# Altium PCB SoM-STM32F4.PcbDoc (part 1 of 2)
Units mm, origin at the board's own origin, x right, y up, seen from the top; angles counter-clockwise.
Board outline 45 x 60 mm, 8 copper layers (Top, GND1, Signal 1, Power, GND3, Signal 2, GND4, Bottom), stack 1.6 mm thick; 102 components, 130 nets, 627 pads, 262 vias.
Unrouted connection lines stored in the file: 167.
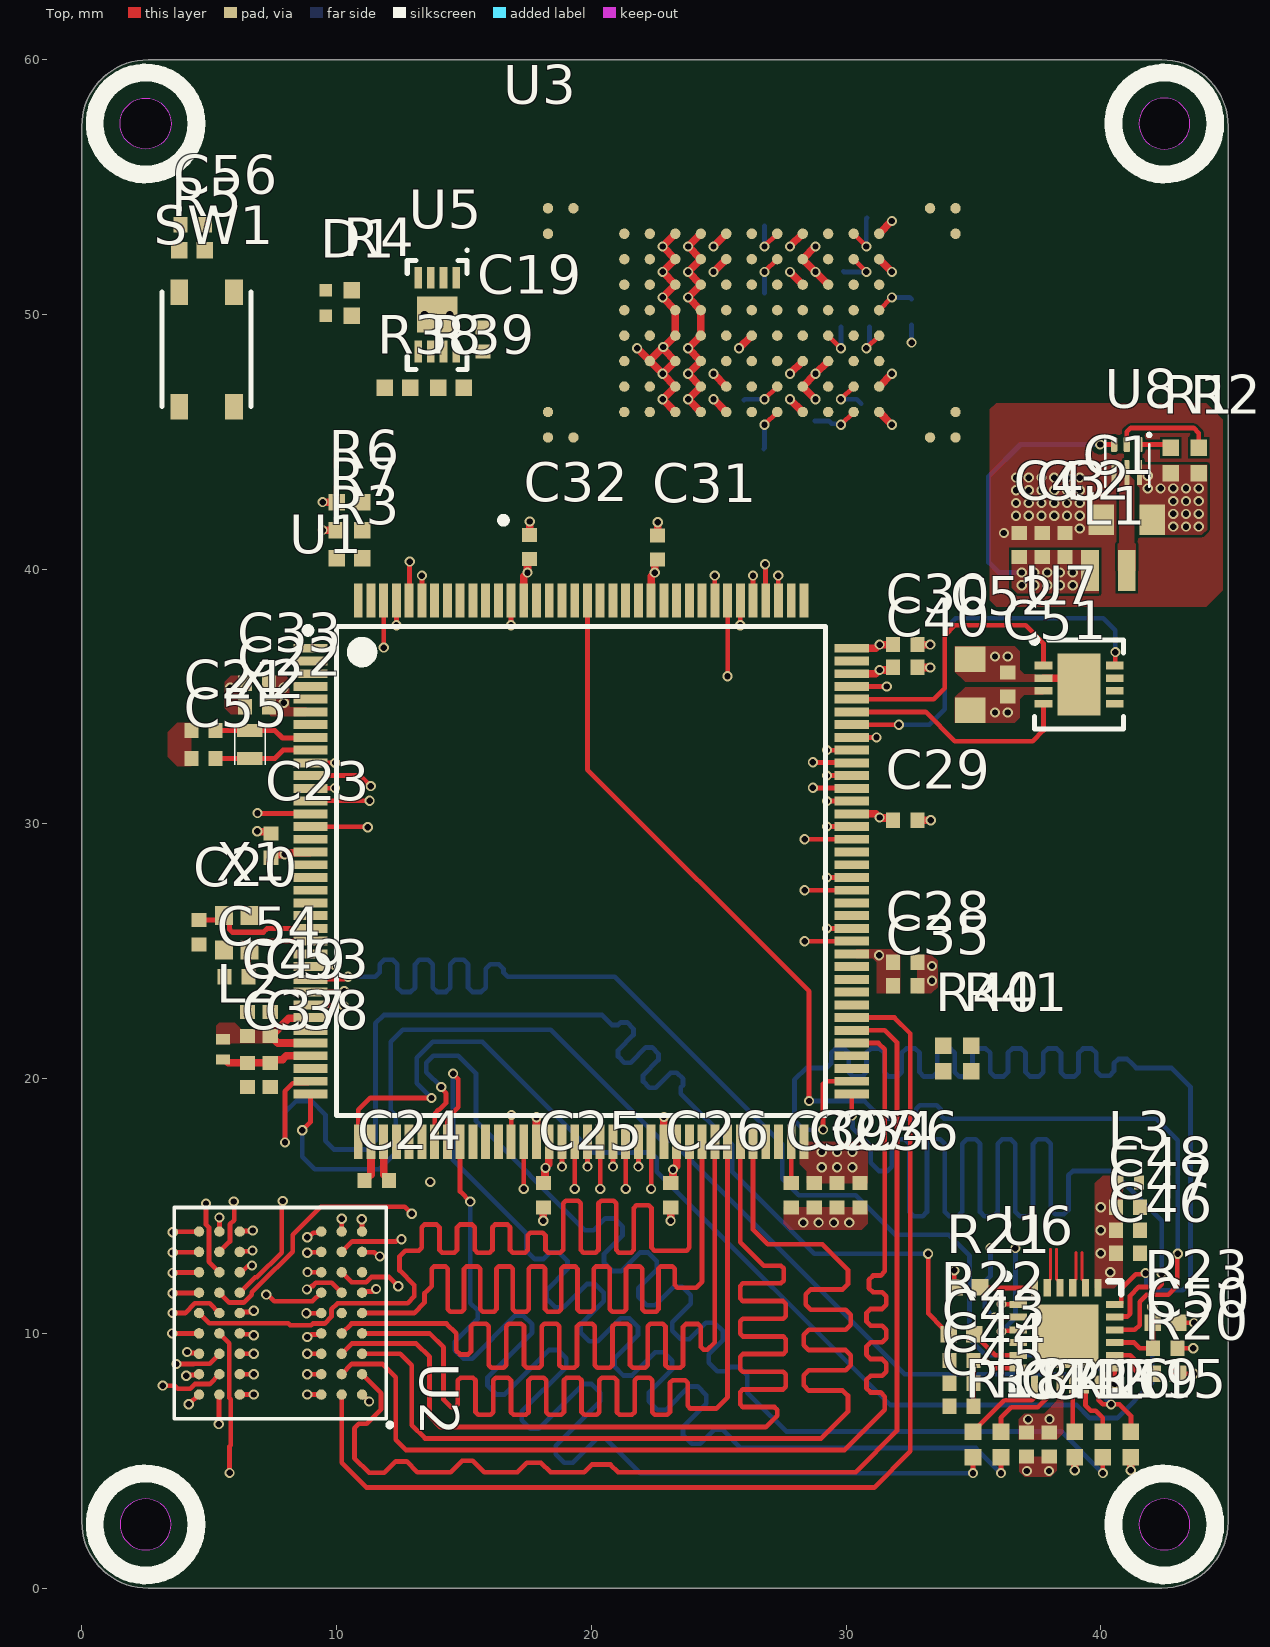
[diagram p0: Top view]
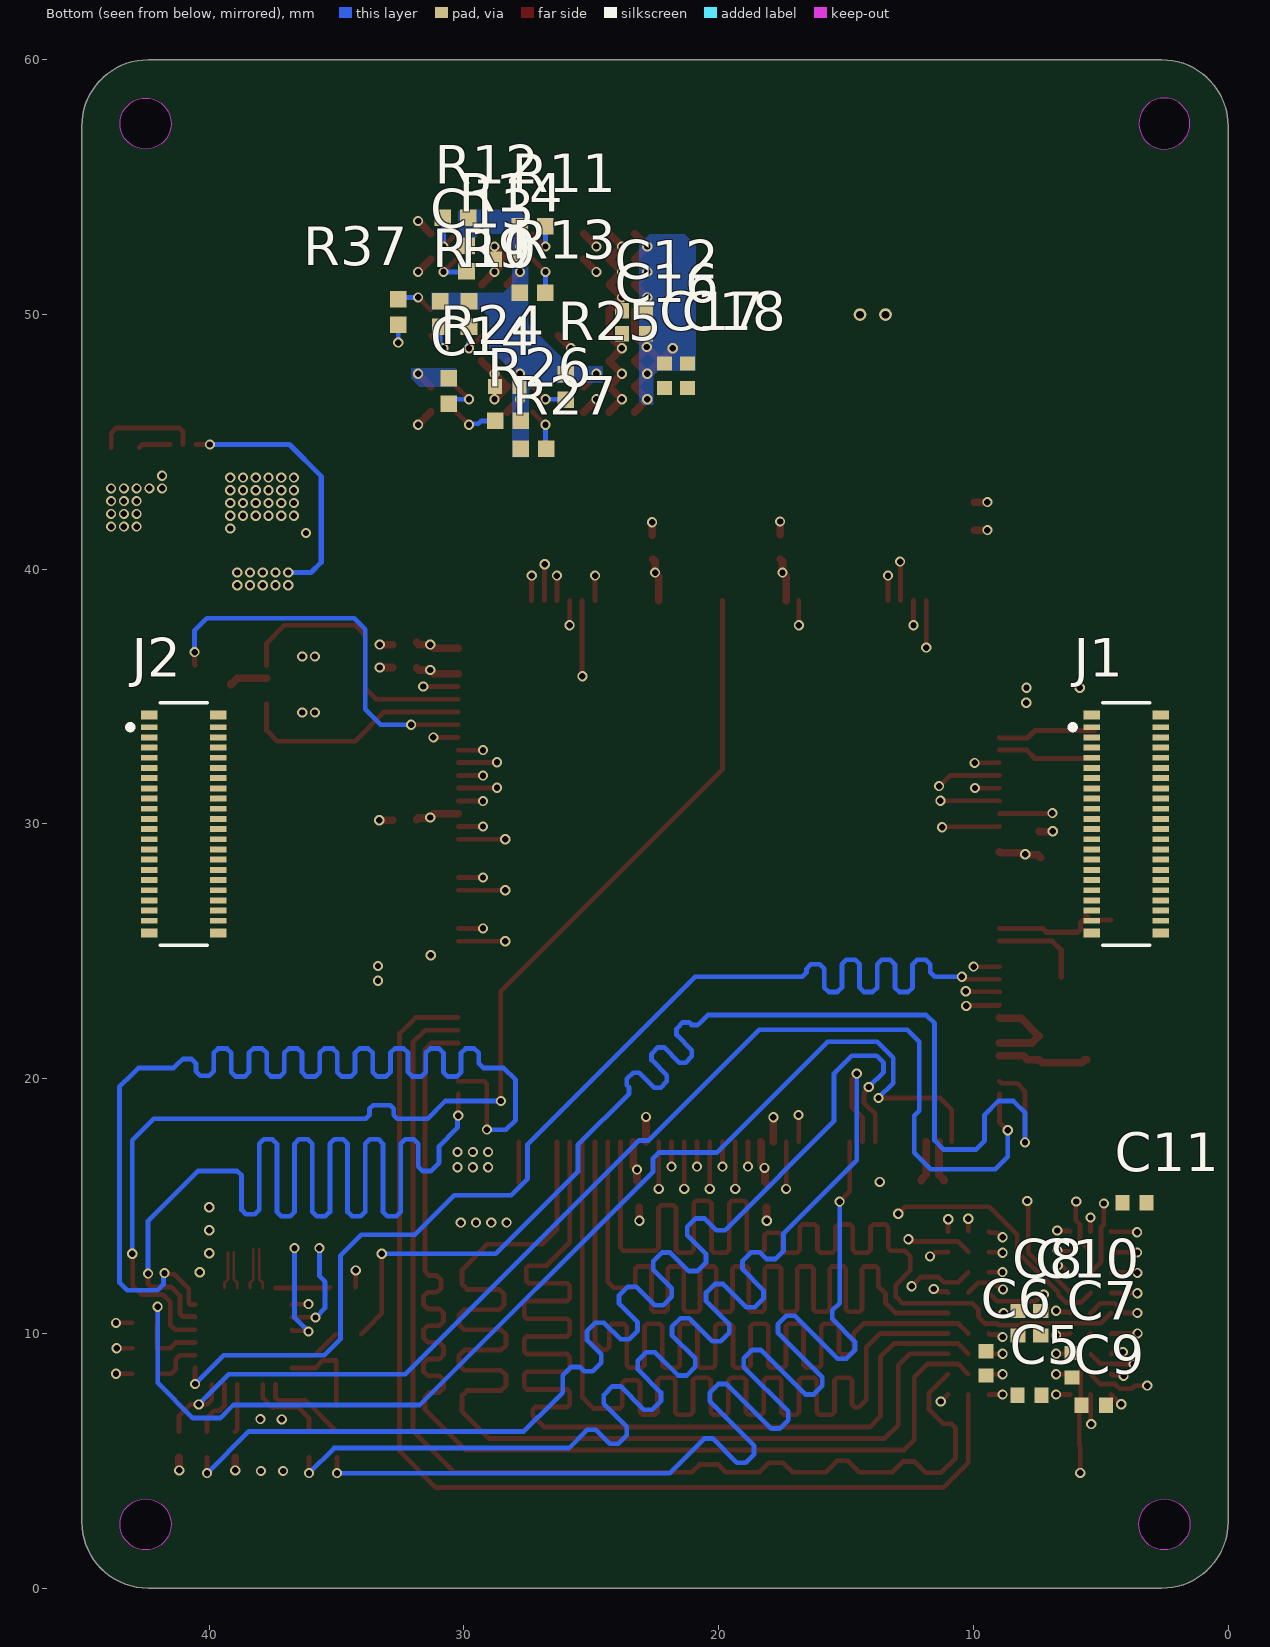
[diagram p1: Bottom view, seen from below]
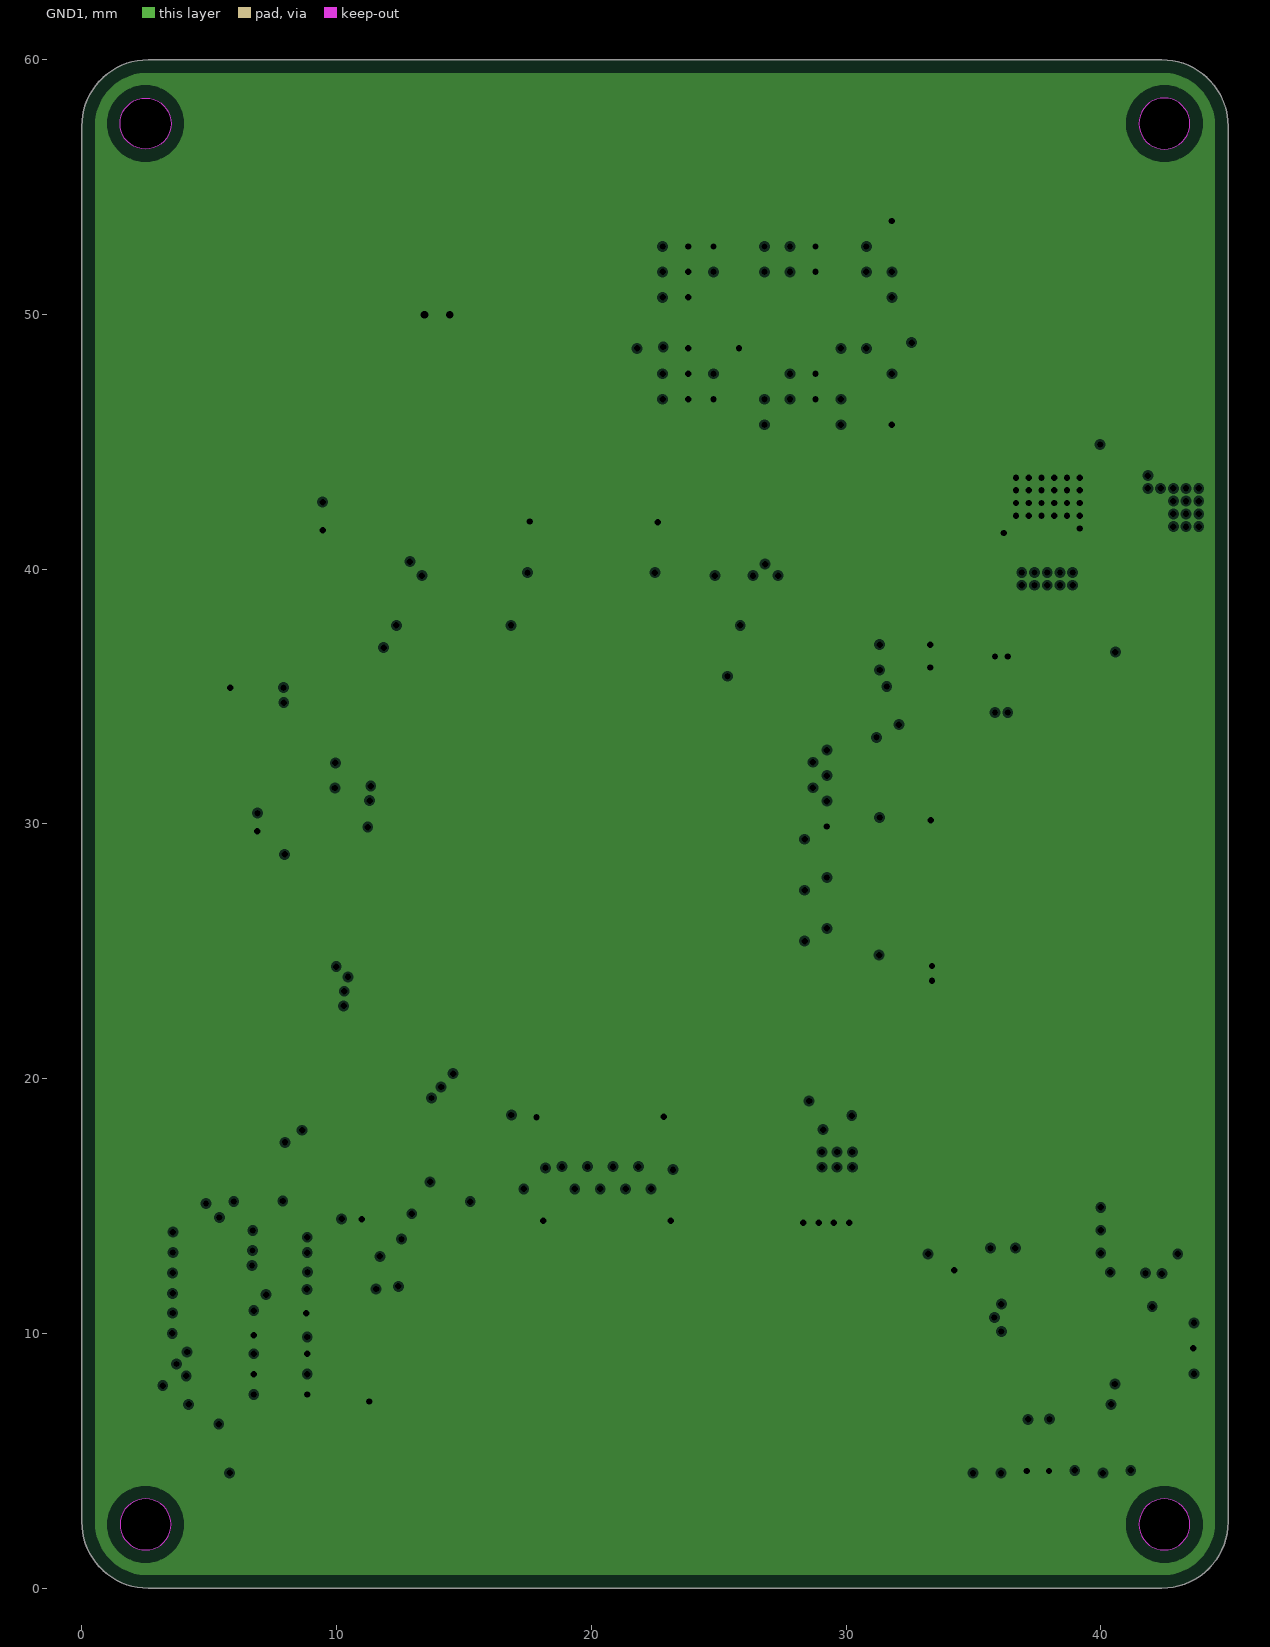
[diagram p2: GND1, clearances drawn from the general rule]
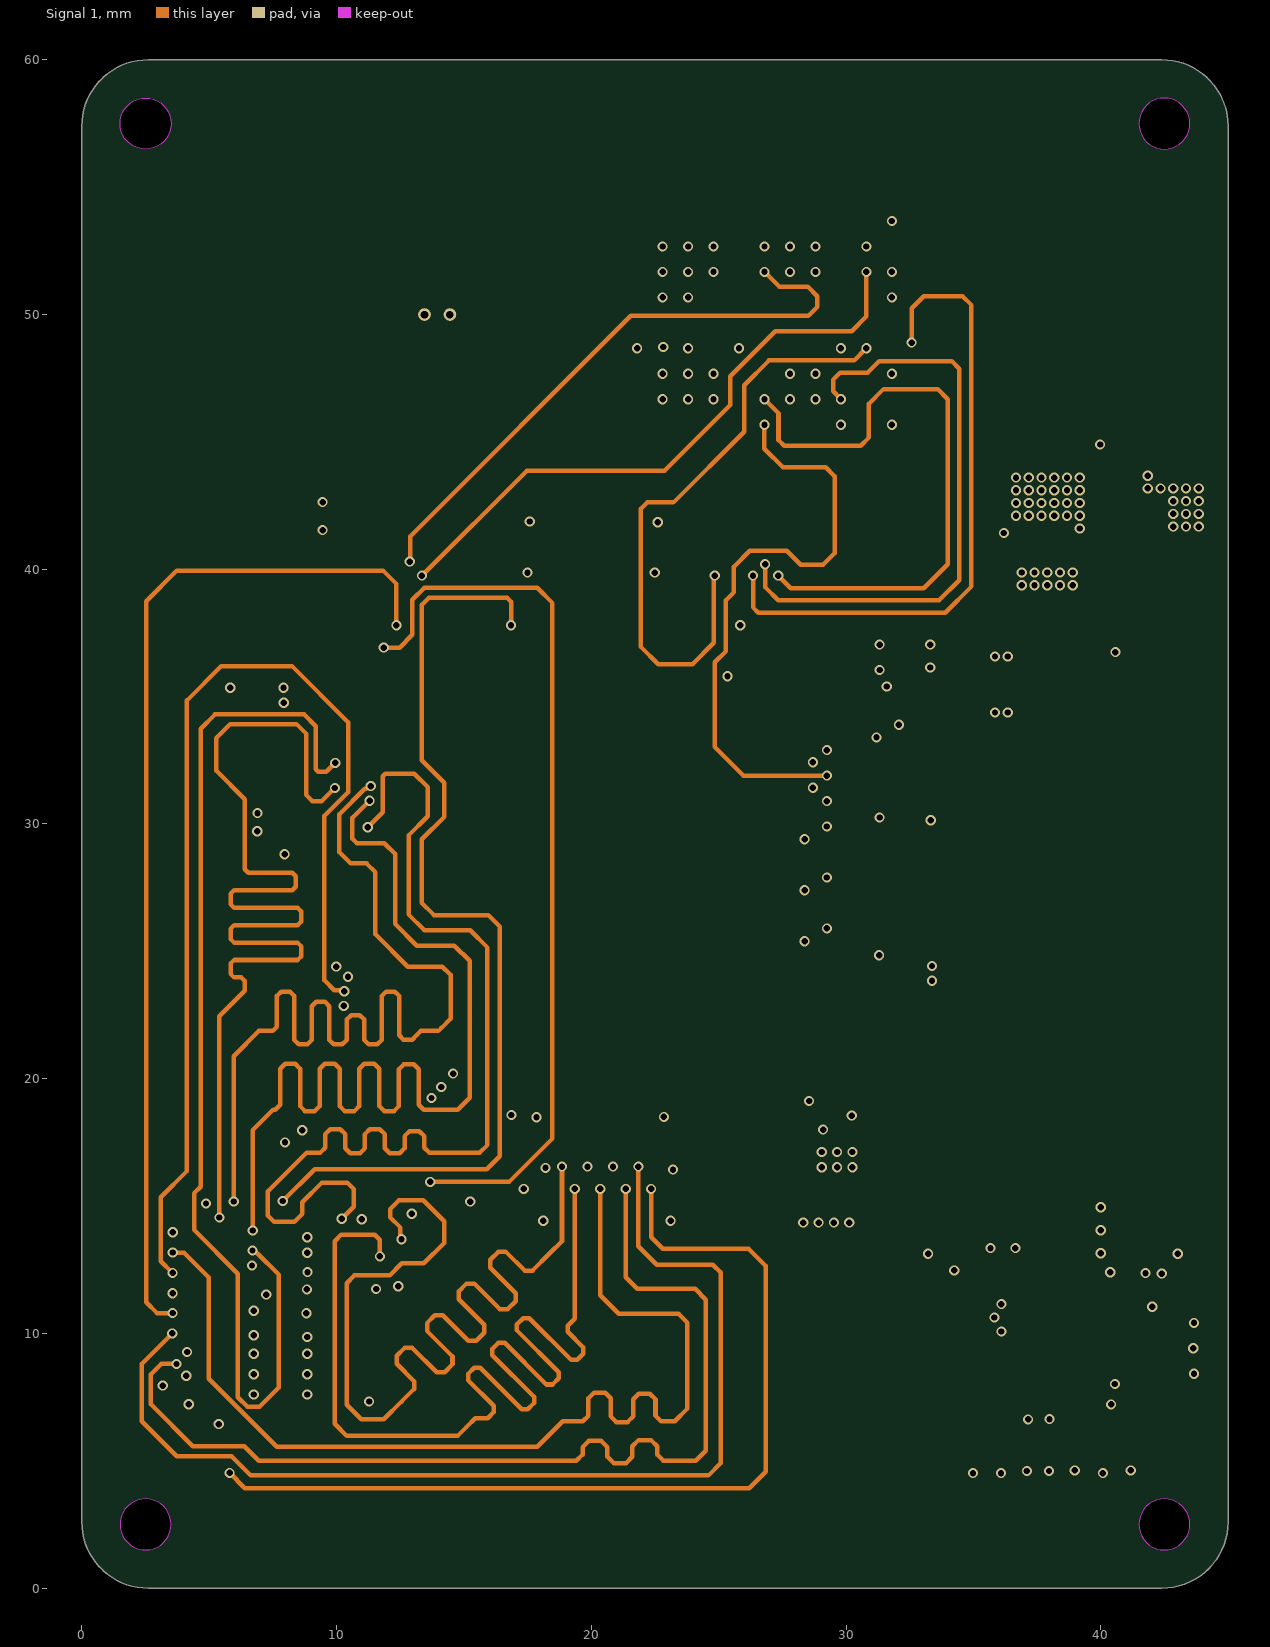
[diagram p3: Signal 1]
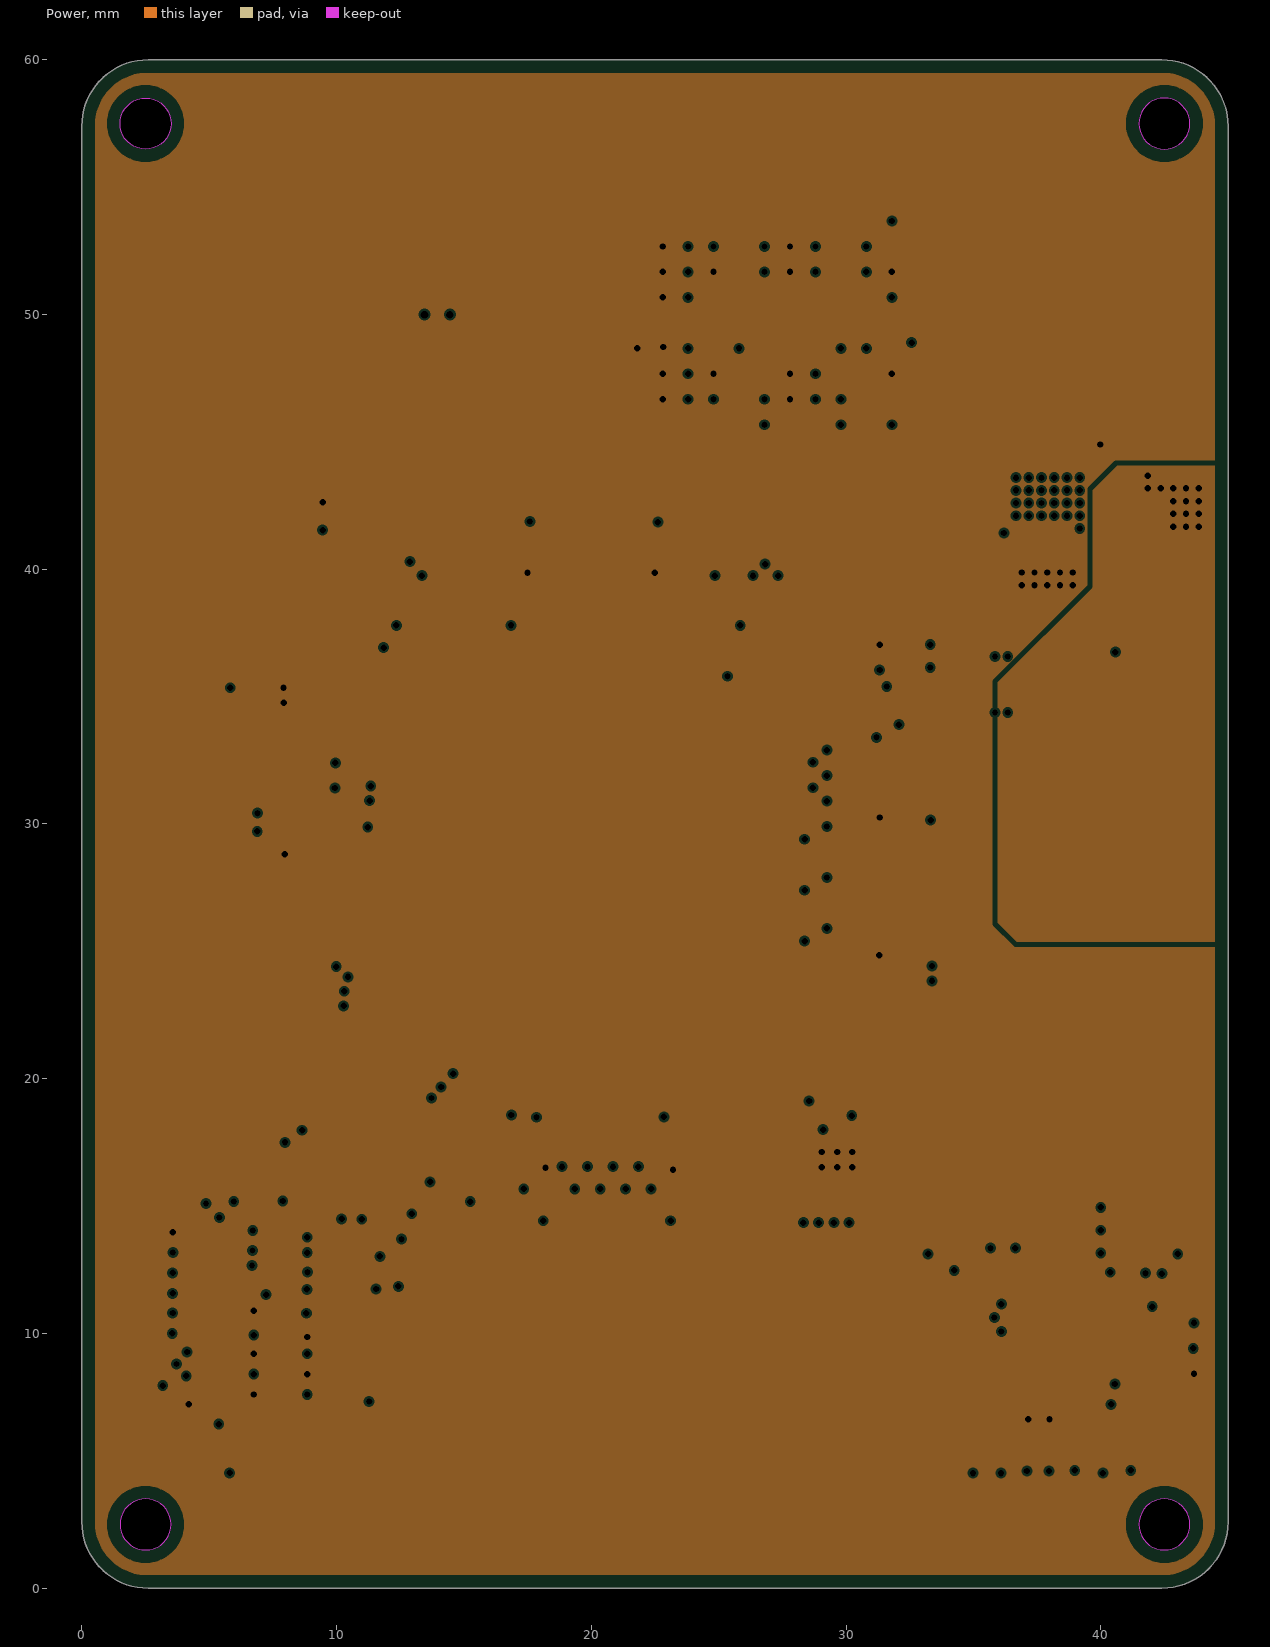
[diagram p4: Power, clearances drawn from the general rule]
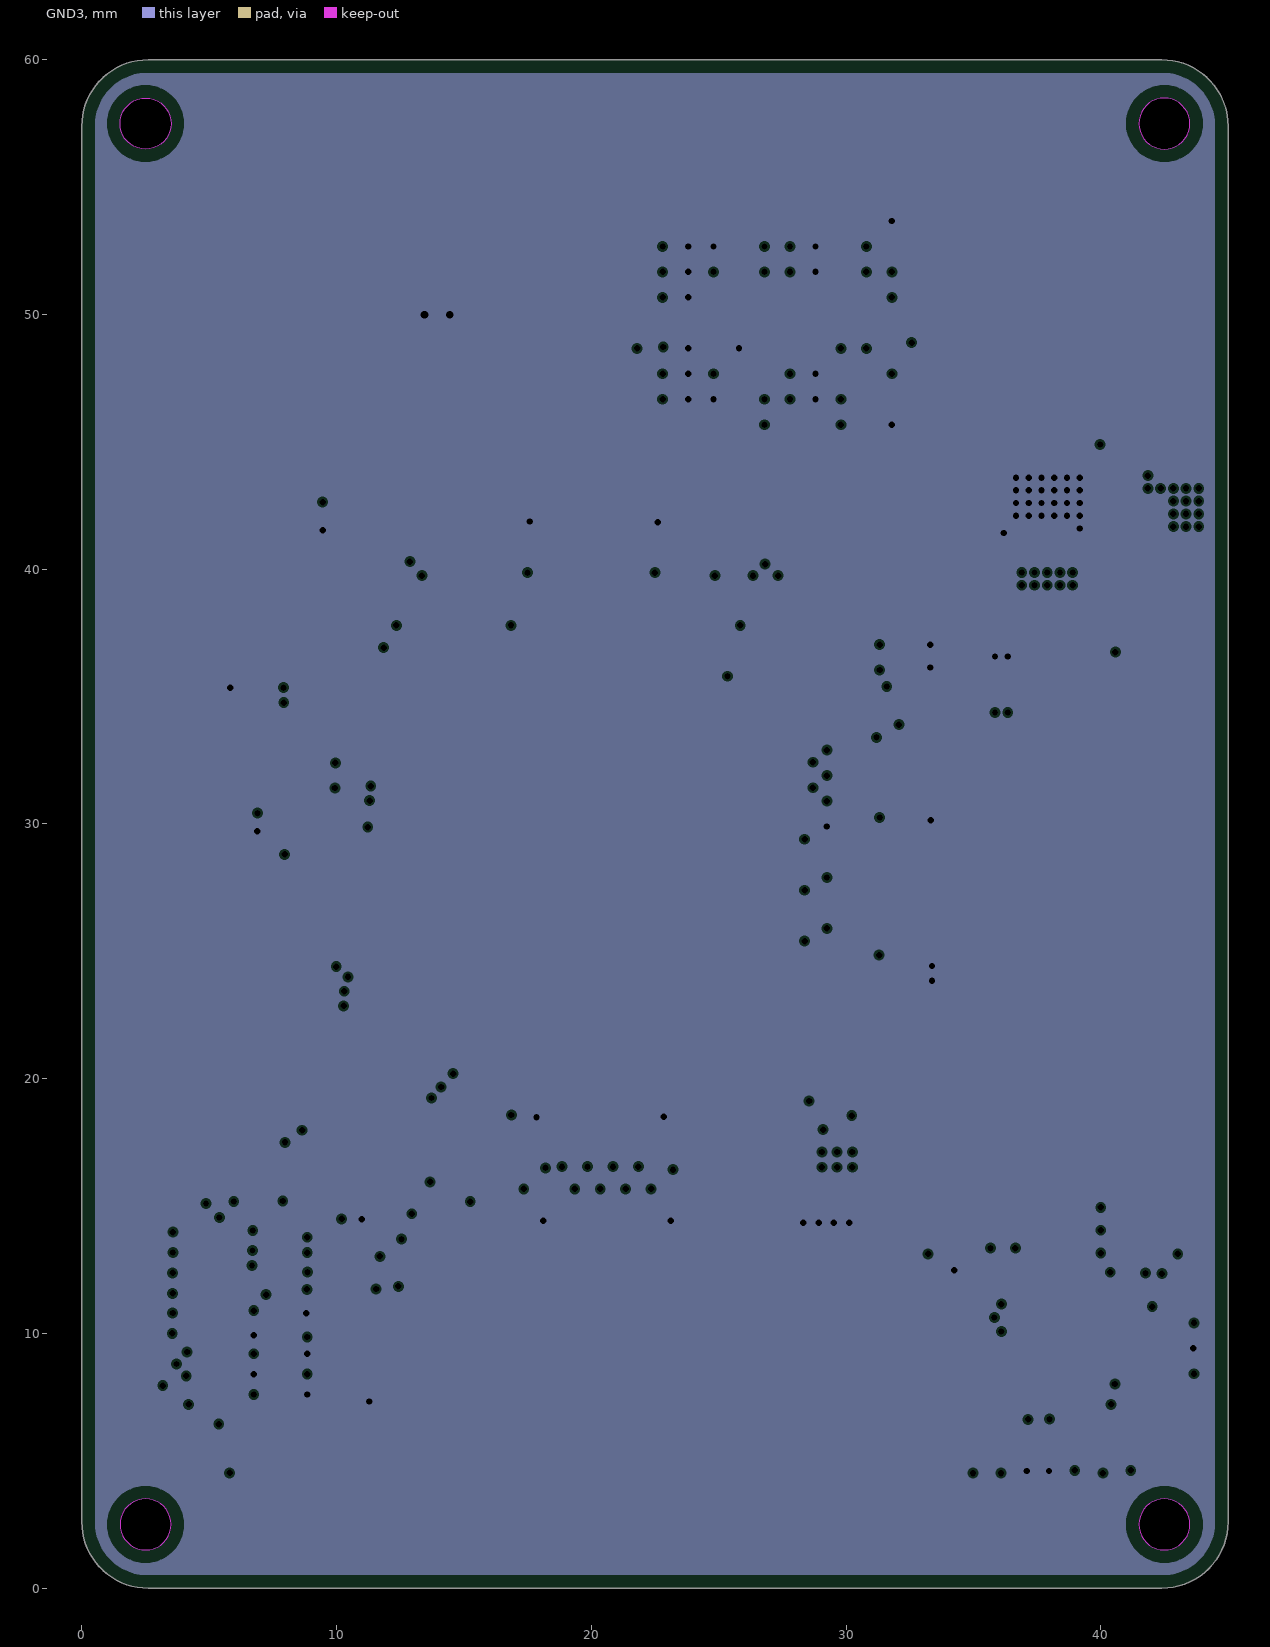
[diagram p5: GND3, clearances drawn from the general rule]
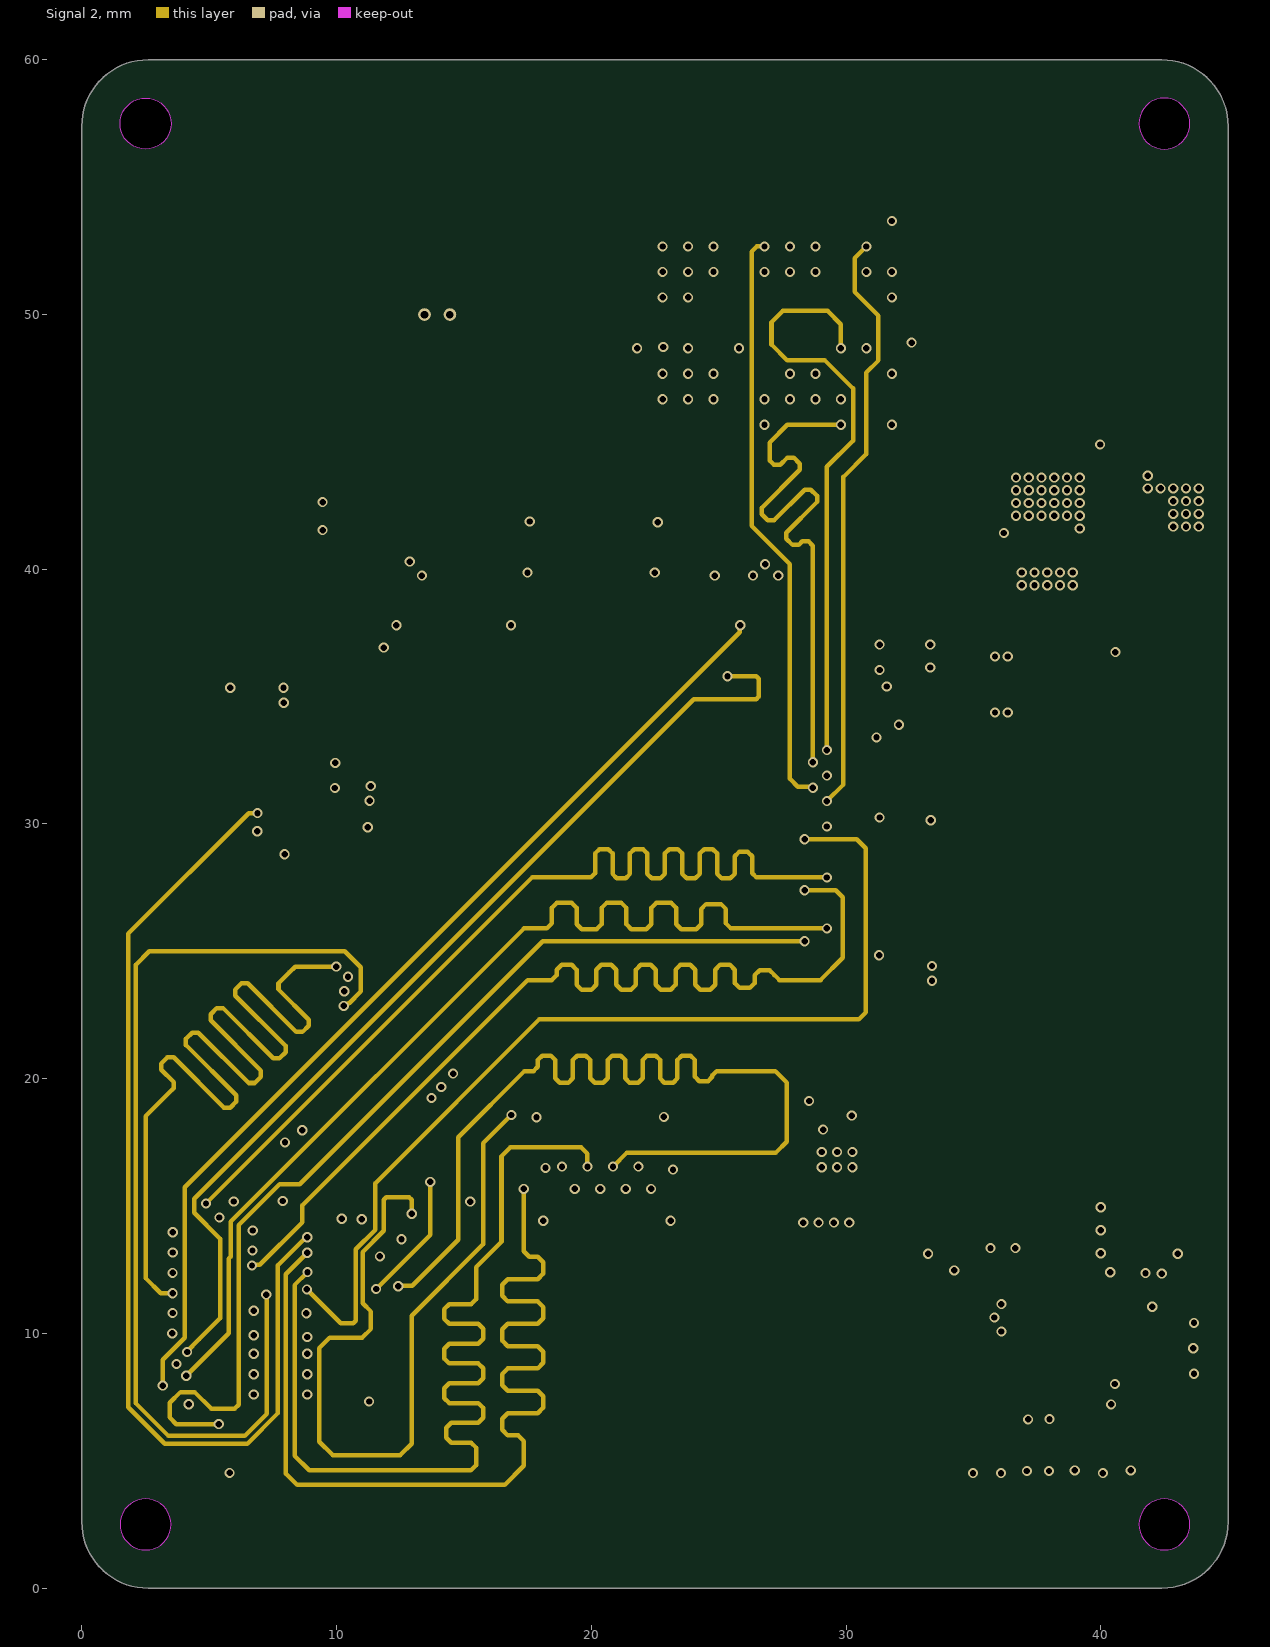
[diagram p6: Signal 2]
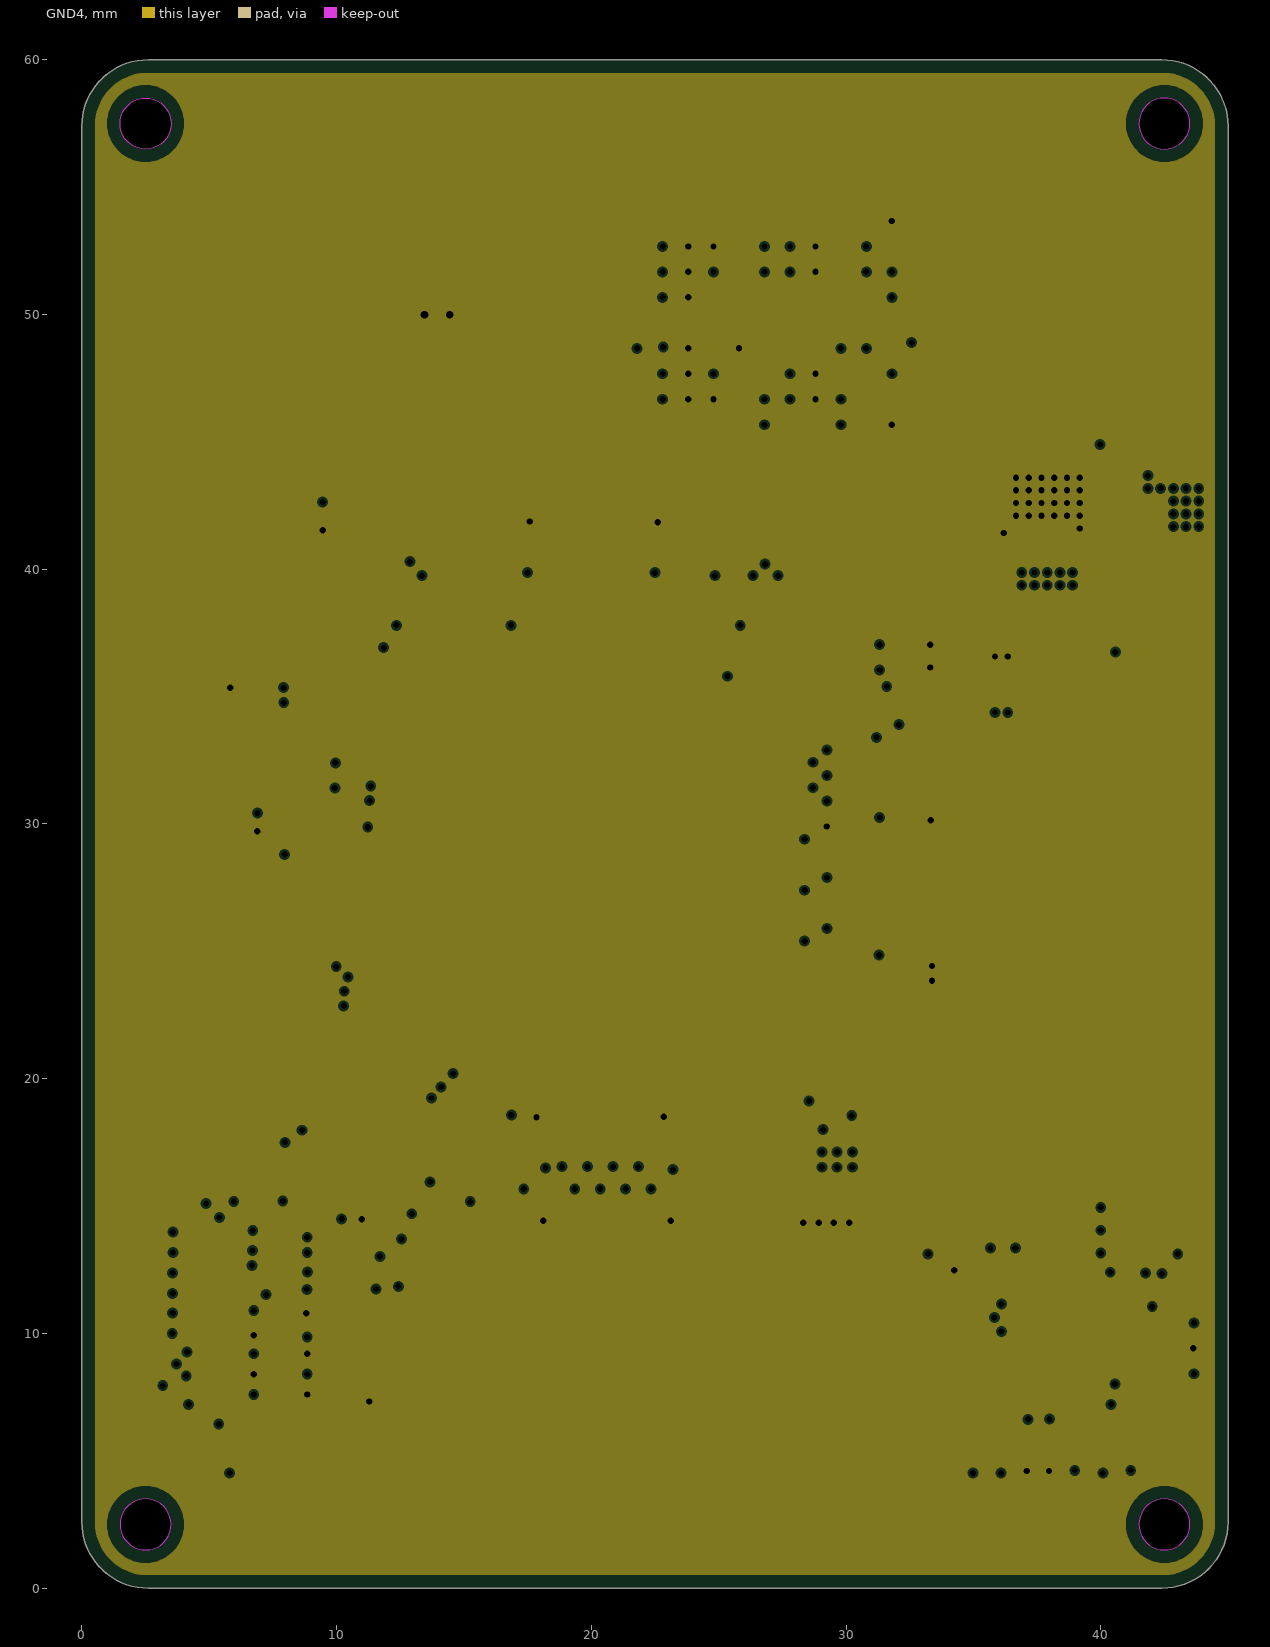
[diagram p7: GND4, clearances drawn from the general rule]

## Layer stack, top to bottom
Top Solder: solder mask 0.025, Solder Resist, Dk 3.7
Top: signal copper 0.035
Dielectric 5: prepreg 0.1164, PP-006, Dk 4.1
GND1: plane copper 0.0152, net GND
Dielectric 1: core 0.3, PP-006, Dk 4.1
Signal 1: signal copper 0.0152
Dielectric 6: prepreg 0.0764, PP-006, Dk 4.3
Dielectric 2: prepreg 0.0764, PP-006, Dk 4.3
Power: plane copper 0.0152, net (Multiple Nets)
Core: core 0.3, FR-4, Dk 4.6
GND3: plane copper 0.0152, net GND
Dielectric 3: prepreg 0.0764, PP-006, Dk 4.3
Dielectric 7: prepreg 0.0764, PP-006, Dk 4.3
Signal 2: signal copper 0.0152
Dielectric 4: core 0.3, PP-006, Dk 4.1
GND4: plane copper 0.0152, net GND
Dielectric 8: prepreg 0.1164, PP-006, Dk 4.1
Bottom: signal copper 0.035
Bottom Solder: solder mask 0.025, Solder Resist, Dk 3.7

## Board outline
0,2.6 ccw(c2.6,2.6) 2.6,0 42.4,0 ccw(c42.4,2.6) 45,2.6 45,57.4 ccw(c42.4,57.4) 42.4,60 2.6,60 ccw(c2.6,57.4) 0,57.4
cut-out: 41.5,2.5 ccw(c42.5,2.5) 42.5,1.5 ccw(c42.5,2.5) 43.5,2.5 ccw(c42.5,2.5) 42.5,3.5 ccw(c42.5,2.5)
cut-out: 41.5,57.5 ccw(c42.5,57.5) 42.5,56.5 ccw(c42.5,57.5) 43.5,57.5 ccw(c42.5,57.5) 42.5,58.5 ccw(c42.5,57.5)
cut-out: 2.5,56.5 cw(c2.5,57.5) 1.5,57.5 cw(c2.5,57.5) 2.5,58.5 cw(c2.5,57.5) 3.5,57.5 cw(c2.5,57.5)
cut-out: 1.5,2.5 ccw(c2.5,2.5) 2.5,1.5 ccw(c2.5,2.5) 3.5,2.5 ccw(c2.5,2.5) 2.5,3.5 ccw(c2.5,2.5)

## Design rules (kind name [scope] priority, off if disabled: settings)
BoardOutlineClearance [All] p1: gap=0.2 ignorepadtopadclearanceinfootprint=FALSE
Clearance [All] p1: gap=0.089 ignorepadtopadclearanceinfootprint=FALSE except(0.127: Arc-Via Track-Via SMDPad-Via THPad-Via Via-Via Via-Fill Via-Poly Via-Region Via-Text; 0.25: Arc-Hole Track-Hole SMDPad-Hole THPad-Hole Via-Hole Fill-Hole Poly-Hole Region-Hole Text-Hole)
ComponentClearance [All] p1: gap=0.089 collisioncheckmode=3 verticalgap=0.089 showdistances=TRUE
DiffPairsRouting DiffPairsRouting_ETH_RX [InDifferentialPairClass('ETH_RX')] p1: maxlimit=0.127 minlimit=0.089 mostfreqgap=0.127 toplayer_mingap=0.127 toplayer_minwidth=0.108 toplayer_maxwidth=0.108 toplayer_prefwidth=0.108 bottomlayer_mingap=0.127 bottomlayer_minwidth=0.108 bottomlayer_maxwidth=0.108 bottomlayer_prefwidth=0.108 impedanceprofiledriven=TRUE impedanceprofileid={E579D6FB-18EF-4DA8-B049-B0F0B09B77A9} impedanceprofilevalue=100.000000 maxuncoupledlength=12.7
DiffPairsRouting DiffPairsRouting_ETH_TX [InDifferentialPairClass('ETH_TX')] p2: maxlimit=0.127 minlimit=0.089 mostfreqgap=0.127 toplayer_mingap=0.127 toplayer_minwidth=0.108 toplayer_maxwidth=0.108 toplayer_prefwidth=0.108 bottomlayer_mingap=0.127 bottomlayer_minwidth=0.108 bottomlayer_maxwidth=0.108 bottomlayer_prefwidth=0.108 impedanceprofiledriven=TRUE impedanceprofileid={E579D6FB-18EF-4DA8-B049-B0F0B09B77A9} impedanceprofilevalue=100.000000 maxuncoupledlength=12.7
Height [All] p1: minheight=0 maxheight=1816.048 prefheight=12.7
HoleSize [All] p1: absolutevalues=TRUE maxlimit=6.3 minlimit=0.2 maxpercent=80.000 minpercent=20.000
HoleToHoleClearance [All] p1: gap=0.25 allowstackedmicrovias=FALSE
MinimumAnnularRing [All] p1: minimumring=0.076
MinimumSolderMaskSliver [All] p1: minsoldermaskwidth=0
PlaneClearance [All] p1: clearance=0.089
PlaneConnect PlaneConnectPowerPads [InPadClass('PowerPads')] p1: planeconnectstyle=Direct reliefexpansion=0.508 reliefentries=4 reliefconductorwidth=0.254 reliefairgap=0.254
PlaneConnect [All] p2: pad.planeconnectstyle=Relief pad.reliefexpansion=0.3 pad.reliefentries=4 pad.reliefconductorwidth=0.089 pad.reliefairgap=0.089 via.planeconnectstyle=Direct via.reliefexpansion=0.3 via.reliefentries=4 via.reliefconductorwidth=0.127 via.reliefairgap=0.127
PolygonConnect PolygonConnectPowerPads [All vs (InPadClass('PowerPads'))] p1: connectstyle=Direct reliefconductorwidth=0.254 reliefentries=4 polygonreliefangle="90 Angle" airgapwidth=0.254
PolygonConnect [All] p2: thpad.connectstyle=Relief thpad.reliefconductorwidth=0.089 thpad.reliefentries=4 thpad.polygonreliefangle="90 Angle" thpad.airgapwidth=0.089 smdpad.connectstyle=Relief smdpad.reliefconductorwidth=0.089 smdpad.reliefentries=4 smdpad.polygonreliefangle="90 Angle" smdpad.airgapwidth=0.089 via.connectstyle=Direct via.reliefconductorwidth=0.127 via.reliefentries=4 via.polygonreliefangle="90 Angle" via.airgapwidth=0.127
RoutingVias [All] p1: holewidth=0.2 width=0.45 viastyle="Through Hole" minholewidth=0.2 minwidth=0.25 maxholewidth=6.3 maxwidth=6.55
SilkToSilkClearance [All] p1: silktosilkclearance=0
SilkToSolderMaskClearance [IsPad] p1: minsilkscreentomaskgap=0.089 clearancetoexposedcopper=TRUE
SolderMaskExpansion [All] p1: expansion=0.075 istentingtop=FALSE
Width Width_50ohm [InNetClass('50OHM')] p1: maxlimit=0.186 minlimit=0.177 preferedwidth=0.186 toplayer_minwidth=0.186 midlayer3_maxwidth=0.177 midlayer3_prefwidth=0.177 midlayer5_maxwidth=0.177 midlayer5_prefwidth=0.177 bottomlayer_minwidth=0.186 minimp=50.000000 maximp=50.000000 favimp=50.000000
Width [All] p2: maxlimit=1816.048 minlimit=0.089 preferedwidth=0.089
20 further rules are at their usual default settings.

## Classes and differential pairs
differential pair class ETH_TX: Ethernet_TX
differential pair class ETH_RX: Ethernet_RX
net class ETHERNET: Ethernet_LED1 Ethernet_LED2 Ethernet_RX_N Ethernet_RX_P Ethernet_TX_N Ethernet_TX_P
net class RMII: ETH_CRS_DV ETH_MDC ETH_MDIO ETH_REF_CLK ETH_RXD0 ETH_RXD1 ETH_TX_EN ETH_TXD0 ETH_TXD1 RMII_RSTn
net class eMMC: eMMC_CLK eMMC_CMD eMMC_DAT0 eMMC_DAT1 eMMC_DAT2 eMMC_DAT3 eMMC_DAT4 eMMC_DAT5 eMMC_DAT6 eMMC_DAT7 eMMC_DS eMMC_RSTN
net class 50OHM: eMMC_CLK eMMC_CMD eMMC_DAT0 eMMC_DAT1 eMMC_DAT2 eMMC_DAT3 eMMC_DAT4 eMMC_DAT5 eMMC_DAT6 eMMC_DAT7 eMMC_DS eMMC_RSTN ETH_CRS_DV ETH_MDC ETH_MDIO ETH_REF_CLK ETH_RXD0 ETH_RXD1 ETH_TX_EN ETH_TXD0 ETH_TXD1 FMC_A0 FMC_A1 FMC_A2 FMC_A3 FMC_A4 FMC_A5 FMC_A6 FMC_A7 FMC_A8 FMC_A9 FMC_A10 FMC_A11 FMC_A14 FMC_A15 FMC_D0 FMC_D1 FMC_D2 FMC_D3 FMC_D4 FMC_D5 FMC_D6 FMC_D7 FMC_D8 FMC_D9 FMC_D10 FMC_D11 FMC_D12 FMC_D13 FMC_D14 FMC_D15 FMC_NBL0 FMC_NBL1 FMC_SDCKE0 FMC_SDCLK FMC_SDNCAS FMC_SDNE0 FMC_SDNRAS FMC_SDNWE RMII_RSTn
net class SDRAM: FMC_A0 FMC_A1 FMC_A2 FMC_A3 FMC_A4 FMC_A5 FMC_A6 FMC_A7 FMC_A8 FMC_A9 FMC_A10 FMC_A11 FMC_A14 FMC_A15 FMC_D0 FMC_D1 FMC_D2 FMC_D3 FMC_D4 FMC_D5 FMC_D6 FMC_D7 FMC_D8 FMC_D9 FMC_D10 FMC_D11 FMC_D12 FMC_D13 FMC_D14 FMC_D15 FMC_NBL0 FMC_NBL1 FMC_SDCKE0 FMC_SDCLK FMC_SDNCAS FMC_SDNE0 FMC_SDNRAS FMC_SDNWE
net class SDRAM.DQ[15..0]: SDRAM.DQ0 SDRAM.DQ1 SDRAM.DQ2 SDRAM.DQ3 SDRAM.DQ4 SDRAM.DQ5 SDRAM.DQ6 SDRAM.DQ7 SDRAM.DQ8 SDRAM.DQ9 SDRAM.DQ10 SDRAM.DQ11 SDRAM.DQ12 SDRAM.DQ13 SDRAM.DQ14 SDRAM.DQ15
net class SDRAM.ADDRESS[11..0]: SDRAM.ADDRESS0 SDRAM.ADDRESS1 SDRAM.ADDRESS2 SDRAM.ADDRESS3 SDRAM.ADDRESS4 SDRAM.ADDRESS5 SDRAM.ADDRESS6 SDRAM.ADDRESS7 SDRAM.ADDRESS8 SDRAM.ADDRESS9 SDRAM.ADDRESS10 SDRAM.ADDRESS11
net class FMC_D[15..0]: FMC_D0 FMC_D1 FMC_D2 FMC_D3 FMC_D4 FMC_D5 FMC_D6 FMC_D7 FMC_D8 FMC_D9 FMC_D10 FMC_D11 FMC_D12 FMC_D13 FMC_D14 FMC_D15
net class FMC_A[11..0]: FMC_A0 FMC_A1 FMC_A2 FMC_A3 FMC_A4 FMC_A5 FMC_A6 FMC_A7 FMC_A8 FMC_A9 FMC_A10 FMC_A11
component class "11 CONNECTOR": J1 J2 R40 R41
component class "10 CAN Bus": C51 C52 U7
component class "09 Ethernet": C41 C42 C43 C44 C45 C46 C47 C48 C50 L3 R15 R16 R17 R18 R19 R20 R21 R22 R23 U6
component class "08 Secure Element": C19 R38 R39 U5
component class "07 eMMC": C12 C13 C14 C16 C17 C18 R9 R10 R11 R12 R13 R14 R24 R25 R26 R27 R37 U3
component class "05 SDRAM": C5 C6 C7 C8 C9 C10 C11 U2
component class "04 MCU": C20 C21 C22 C23 C24 C25 C26 C27 C28 C29 C30 C31 C32 C33 C34 C35 C36 C37 C38 C39 C40 C49 C53 C54 C55 C56 D1 L2 R3 R4 R5 R6 R7 SW1 U1 U9 X1 X2
component class "03 POWER": C1 C2 C3 C4 L1 R1 R2 U8
differential pair Ethernet_TX: +Ethernet_TX_P -Ethernet_TX_N
differential pair Ethernet_RX: +Ethernet_RX_P -Ethernet_RX_N

## Components (designator, comment, footprint, x,y, rotation, side; value= is the part's Value field where it differs from the comment)
C1 "4.7uF/10V" CAPC1608X10M-0603 41.025,41.95 r0 top
C2 "10uF/6.3V" CAPC1005X06M-0402 38.6,40.95 r270 top
C3 "10uF/6.3V" CAPC1005X06M-0402 37.7,40.95 r270 top
C4 "10uF/6.3V" CAPC1005X06M-0402 36.8,40.95 r270 top
C5 "100nF/50V" CAPC1005X06M-0402 7.8,7.575 r180 bottom
C6 "100nF/50V" CAPC1005X06M-0402 9.5,8.825 r270 bottom
C7 "100nF/50V" CAPC1005X06M-0402 6.125,8.75 r90 bottom
C8 "100nF/50V" CAPC1005X06M-0402 8.25,10.4 r270 bottom
C9 "100nF/50V" CAPC1005X06M-0402 5.275,7.175 r180 bottom
C10 "100nF/50V" CAPC1005X06M-0402 7.35,10.4 r90 bottom
C11 "100nF/50V" CAPC1005X06M-0402 3.675,15.125 r0 bottom
C12 "4.7uF/6.3V" CAPC1005X06M-0402 23.325,50.15 r180 bottom
C13 "4.7uF/6.3V" CAPC1005X06M-0402 28.3,52.175 r180 bottom
C14 "100nF/50V" CAPC1005X06M-0402 28.3,47.175 r180 bottom
C16 "100nF/50V" CAPC1005X06M-0402 23.325,49.25 r180 bottom
C17 "4.7uF/6.3V" CAPC1005X06M-0402 22.125,47.6 r90 bottom
C18 "100nF/50V" CAPC1005X06M-0402 21.225,47.6 r90 bottom
C19 "100nF/50V" CAPC1005X06M-0402 15.75,49.025 r270 top
C20 "8pF/50V" CAPC1005X06M-0402 4.6,25.75 r270 top
C21 "22pF/50V" CAPC1005X06M-0402 4.775,33.675 r180 top
C22 "100nF/50V" CAPC1005X06M-0402 6.875,34.6 r0 top
C23 "100nF/50V" CAPC1005X06M-0402 7.425,29.15 r270 top
C24 "100nF/50V" CAPC1005X06M-0402 11.575,16 r0 top
C25 "100nF/50V" CAPC1005X06M-0402 18.125,15.425 r90 top
C26 "100nF/50V" CAPC1005X06M-0402 23.125,15.425 r90 top
C27 "100nF/50V" CAPC1005X06M-0402 28.75,15.425 r90 top
C28 "100nF/50V" CAPC1005X06M-0402 32.325,24.575 r180 top
C29 "100nF/50V" CAPC1005X06M-0402 32.325,30.15 r180 top
C30 "100nF/50V" CAPC1005X06M-0402 32.325,37.05 r180 top
C31 "100nF/50V" CAPC1005X06M-0402 22.6,40.85 r270 top
C32 "100nF/50V" CAPC1005X06M-0402 17.575,40.875 r270 top
C33 "100nF/50V" CAPC1005X06M-0402 6.875,35.525 r0 top
C34 "100nF/50V" CAPC1005X06M-0402 29.65,15.425 r90 top
C35 "100nF/50V" CAPC1005X06M-0402 32.325,23.65 r180 top
C36 "4.7uF/6.3V" CAPC1005X06M-0402 30.55,15.425 r90 top
C37 "100nF/50V" CAPC1005X06M-0402 6.5,20.15 r90 top
C38 "1uF/6.3V" CAPC1005X06M-0402 7.4,20.15 r90 top
C39 "100nF/50V" CAPC1005X06M-0402 27.85,15.425 r90 top
C40 "100nF/50V" CAPC1005X06M-0402 32.325,36.15 r180 top
C41 "100nF/50V" CAPC1005X06M-0402 37.085,5.64 r90 top
C42 "100nF/50V" CAPC1005X06M-0402 37.985,5.64 r90 top
C43 "470pF/50V" CAPC1005X06M-0402 34.535,8.94 r0 top
C44 "1uF/6.3V" CAPC1005X06M-0402 34.535,8.04 r0 top
C45 "4.7uF/6.3V" CAPC1005X06M-0402 34.535,7.14 r0 top
C46 "100nF/50V" CAPC1005X06M-0402 41.075,13.15 r180 top
C47 "100nF/50V" CAPC1005X06M-0402 41.075,14.05 r180 top
C48 "1uF/6.3V" CAPC1005X06M-0402 41.075,14.95 r180 top
C49 "100nF/50V" CAPC1005X06M-0402 6.5,22.15 r270 top
C50 "100nF/50V" CAPC1005X06M-0402 42.535,9.415 r180 top
C51 "100nF/50V" CAPC1005X06M-0402 36.35,35.475 r270 top
C52 "47uF/6.3V" CAPC1608X10M-0603 34.875,35.475 r270 top
C53 "1uF/6.3V" CAPC1005X06M-0402 7.4,22.15 r270 top
C54 "8pF/50V" CAPC1005X06M-0402 6.075,24 r180 top
C55 "22pF/50V" CAPC1005X06M-0402 4.775,32.575 r180 top
C56 "100nF/50V" CAPC1005X06M-0402 4.35,53.525 r180 top
D1 "WHITE LED" LED-0402 9.578,50.45 r90 top
J1 "DF40C-40DP-0.4V(51)" DF40C-40DP-0.4V(51) 4,30 r270 bottom
J2 "DF40C-40DP-0.4V(51)" DF40C-40DP-0.4V(51) 41,30 r270 bottom
L1 "0.47uH/40mOhm" INDC200x160-2016 40.3,39.95 r180 top
L2 "600Ohms@100MHz" INDC1005X06M-0402 5.55,21.15 r270 top
L3 "600Ohms@100MHz" INDC1005X06M-0402 41.1,15.925 r180 top
R1 "100k/1%" RESC1005X04M-0402 42.75,44.275 r270 top
R2 "100k/1%" RESC1005X04M-0402 43.85,44.275 r270 top
R3 "100k/1%" RESC1005X04M-0402 10.5,40.425 r0 top
R4 "1.5k/1%" RESC1005X04M-0402 10.6,50.45 r90 top
R5 "100k/1%" RESC1005X04M-0402 4.325,52.525 r180 top
R6 "100k/1%" RESC1005X04M-0402 10.5,42.625 r0 top
R7 "100k/1%" RESC1005X04M-0402 10.5,41.525 r0 top
R9 "47K/1%" RESC1005X04M-0402 29.8,50.025 r90 bottom
R10 "47K/1%" RESC1005X04M-0402 30.925,50.025 r90 bottom
R11 "47K/1%" RESC1005X04M-0402 27.3,53.475 r0 bottom
R12 "47K/1%" RESC1005X04M-0402 30.325,53.8 r180 bottom
R13 "47K/1%" RESC1005X04M-0402 27.3,50.85 r0 bottom
R14 "47K/1%" RESC1005X04M-0402 29.9,52.2 r90 bottom
R15 "1.5k/1%" RESC1005X04M-0402 41.185,5.64 r270 top
R16 "10/1%" RESC1005X04M-0402 38.985,5.64 r270 top
R17 "10/1%" RESC1005X04M-0402 36.085,5.64 r90 top
R18 "10/1%" RESC1005X04M-0402 34.985,5.64 r90 top
R19 "10/1%" RESC1005X04M-0402 40.085,5.64 r90 top
R20 "100k/1%" RESC1005X04M-0402 42.535,8.415 r180 top
R21 "12.1k/1%" RESC1005X04M-0402 34.76,11.815 r180 top
R22 "33/1%" RESC1005X04M-0402 34.535,9.965 r0 top
R23 "100k/1%" RESC1005X04M-0402 42.535,10.415 r180 top
R24 "47K/1%" RESC1005X04M-0402 30.6,47 r90 bottom
R25 "47K/1%" RESC1005X04M-0402 26,47.15 r90 bottom
R26 "47K/1%" RESC1005X04M-0402 28.275,45.825 r180 bottom
R27 "47K/1%" RESC1005X04M-0402 27.275,44.725 r0 bottom
R37 "22/1%" RESC1005X04M-0402 32.575,50.1 r90 bottom
R38 "4.7k/1%" RESC1005X04M-0402 12.4,47.125 r180 top
R39 "4.7k/1%" RESC1005X04M-0402 14.5,47.125 r0 top
R40 "4.7k/1%" RESC1005X04M-0402 33.825,20.8 r90 top
R41 "4.7k/1%" RESC1005X04M-0402 34.925,20.8 r90 top
SW1 "Switch SPST-NO" "PTS815 SJM 250 SMTR LFS" 4.897,48.635 r90 top
U1 "STM32F429ZET6TR" TSQFP50P2200X2200X160-144N 19.6,28.15 r0 top locked
U2 "AS4C8M16SA-6BINTR" TFBGA-54 7.8,10.8 r180 top
U3 "IS21TF08G-JQLI" BGA180C100P10X18_1400X1400X140 26.3,49.675 r90 top
U5 "ATECC608A-MAHDA-S" SON50P200X60_HS-9N 13.95,50 r270 top
U6 "LAN8720A-CP-ABC" QFN24P50_40X40X85L40X25 38.66,9.89 r0 top
U7 "LTC2875HDD#TRPBF" DFN-8 39.15,35.475 r0 top
U8 "TPS6282533DMQR" "VSON-HR (DMQ)" 41.025,44.25 r270 top
X1 "25MHz" 4-SMD 6.075,25.725 r90 top
X2 "32.7680KHZ" 2-SMD 6.6,33.125 r90 top

## Footprints (in the part's own frame and the unit in brackets; to place one, negate y for a bottom-side part, rotate by r counter-clockwise, add the part's x,y. Pads: shape width x height; smd on the part's side, far side on the other; paste and mask are expansions set on the pad)
2-SMD [mm]
  rect 0.5x1 smd mask+0.05: 1(-0.55,0) 2(0.55,0)
  silkscreen extent -0.8,-0.6 0.8,0.6, body extent -0.8,-0.5 0.8,0.5, height 0.51
4-SMD [mm]
  rect 0.75x0.7 smd mask+0.05: 1(-0.675,-0.5) 2(0.675,-0.5) 3(0.675,0.5) 4(-0.675,0.5)
  body extent -1,-0.8 1,0.8, height 0.71
BGA180C100P10X18_1400X1400X140 [mm] "BGA, 180-Leads, Body 14.00x14.00mmx1.40mm, Pitch 1.00mm"
  round 0.41 smd: A1(-4.5,8) A2(-3.5,8) A9(3.5,8) A10(4.5,8) B1(-4.5,7) B10(4.5,7) D2(-3.5,5) D3(-2.5,5) D4(-1.5,5) D5(-0.5,5) D6(0.5,5) D7(1.5,5) D8(2.5,5) D9(3.5,5) E2(-3.5,4) E3(-2.5,4) E4(-1.5,4) E5(-0.5,4) E6(0.5,4) E7(1.5,4) E8(2.5,4) E9(3.5,4) F2(-3.5,3) F3(-2.5,3) F4(-1.5,3) F5(-0.5,3) F6(0.5,3) F7(1.5,3) F8(2.5,3) F9(3.5,3) G2(-3.5,2) G3(-2.5,2) G4(-1.5,2) G5(-0.5,2) G6(0.5,2) G7(1.5,2) G8(2.5,2) G9(3.5,2) H2(-3.5,1) H3(-2.5,1) H4(-1.5,1) H5(-0.5,1) H6(0.5,1) H7(1.5,1) H8(2.5,1) H9(3.5,1) J2(-3.5,0) J3(-2.5,0) J4(-1.5,0) J5(-0.5,0) J6(0.5,0) J7(1.5,0) J8(2.5,0) J9(3.5,0) K2(-3.5,-1) K3(-2.5,-1) K4(-1.5,-1) K5(-0.5,-1) K6(0.5,-1) K7(1.5,-1) K8(2.5,-1) K9(3.5,-1) L2(-3.5,-2) L3(-2.5,-2) L4(-1.5,-2) L5(-0.5,-2) L6(0.5,-2) L7(1.5,-2) L8(2.5,-2) L9(3.5,-2) M2(-3.5,-3) M3(-2.5,-3) M4(-1.5,-3) M5(-0.5,-3) M6(0.5,-3) M7(1.5,-3) M8(2.5,-3) M9(3.5,-3) N2(-3.5,-4) N3(-2.5,-4) N4(-1.5,-4) N5(-0.5,-4) N6(0.5,-4) N7(1.5,-4) N8(2.5,-4) N9(3.5,-4) P2(-3.5,-5) P3(-2.5,-5) P4(-1.5,-5) P5(-0.5,-5) P6(0.5,-5) P7(1.5,-5) P8(2.5,-5) P9(3.5,-5) T1(-4.5,-7) T10(4.5,-7) U1(-4.5,-8) U2(-3.5,-8) U9(3.5,-8) U10(4.5,-8)
  silkscreen extent -7.87,9.62 -7.63,9.87, body extent -7.05,-9.06 7.05,9.05, height 1.4
CAPC1005X06M-0402 [mm] "Chip Capacitor, 2-Leads, Body 1.00x0.50mm, IPC Low Density"
  rect 0.55x0.6 smd: 1(-0.475,0) 2(0.475,0)
  body extent -0.55,-0.3 0.55,0.3, height 0.6
CAPC1608X10M-0603 [mm] "Chip Capacitor, 2-Leads, Body 1.60x0.80mm, IPC Low Density"
  rect 1x1.2 smd: 1(-1,0) 2(1,0)
  body extent -0.9,-0.5 0.9,0.5, height 1
DF40C-40DP-0.4V(51) [mm]
  rect 0.23x0.66 smd: 1(-3.8,-1.355) 2(-3.8,1.355) 3(-3.4,-1.355) 4(-3.4,1.355) 5(-3,-1.355) 6(-3,1.355) 7(-2.6,-1.355) 8(-2.6,1.355) 9(-2.2,-1.355) 10(-2.2,1.355) 11(-1.8,-1.355) 12(-1.8,1.355) 13(-1.4,-1.355) 14(-1.4,1.355) 15(-1,-1.355) 16(-1,1.355) 17(-0.6,-1.355) 18(-0.6,1.355) 19(-0.2,-1.355) 20(-0.2,1.355) 21(0.2,-1.355) 22(0.2,1.355) 23(0.6,-1.355) 24(0.6,1.355) 25(1,-1.355) 26(1,1.355) 27(1.4,-1.355) 28(1.4,1.355) 29(1.8,-1.355) 30(1.8,1.355) 31(2.2,-1.355) 32(2.2,1.355) 33(2.6,-1.355) 34(2.6,1.355) 35(3,-1.355) 36(3,1.355) 37(3.4,-1.355) 38(3.4,1.355) 39(3.8,-1.355) 40(3.8,1.355)
  rect 0.35x0.66 smd: S1(-4.275,-1.355) S2(-4.275,1.355) S3(4.275,-1.355) S4(4.275,1.355)
  silkscreen extent -4.76,-2.2 4.76,0.92, body extent -4.76,-1.47 4.76,1.5, height 1.15
DFN-8 [mm]
  rect 0.7x0.3 smd: 1(-1.4,0.75) 2(-1.4,0.25) 3(-1.4,-0.25) 4(-1.4,-0.75) 5(1.4,-0.75) 6(1.4,-0.25) 7(1.4,0.25) 8(1.4,0.75)
  rect 1.7x2.43 smd paste-2539.97: 9(0,0)
  silkscreen extent -1.85,-1.75 1.75,1.85, body extent -1.56,-1.55 1.56,1.55, height 0.81
INDC200x160-2016 [mm]
  rect 0.7x1.6 smd: 1(-0.725,0) 2(0.725,0)
  body extent -1,-0.8 1,0.8, height 1
INDC1005X06M-0402 [mm] "Chip Inductor, 2-Leads, Body 1.00x0.50mm, IPC Low Density"
  rect 0.4x0.55 smd: 1(-0.4,0) 2(0.4,0)
  body extent -0.53,-0.28 0.53,0.28, height 0.55
LED-0402 [mm]
  rect 0.5x0.5 smd: 1(-0.5,0) 2(0.5,0)
  body extent -0.52,-0.25 0.48,0.25, height 0.5
"PTS815 SJM 250 SMTR LFS" [mm]
  rect 1x0.7 smd paste-2539.97: 1(-2.25,1.075) 2(2.25,1.075) 3(-2.25,-1.075) 4(2.25,-1.075)
  silkscreen extent -2.25,-1.75 2.25,1.75, body extent -2.25,-1.6 2.25,1.6, height 2.51
QFN24P50_40X40X85L40X25 [mm]
  rect 0.69x0.28 smd: 1(-1.895,1.25) 2(-1.895,0.75) 3(-1.895,0.25) 4(-1.895,-0.25) 5(-1.895,-0.75) 6(-1.895,-1.25) 13(1.895,-1.25) 14(1.895,-0.75) 15(1.895,-0.25) 16(1.895,0.25) 17(1.895,0.75) 18(1.895,1.25)
  rect 0.28x0.69 smd: 7(-1.26,-1.895) 8(-0.76,-1.895) 9(-0.26,-1.895) 10(0.24,-1.895) 11(0.74,-1.895) 12(1.24,-1.895) 19(1.24,1.895) 20(0.74,1.895) 21(0.24,1.895) 22(-0.26,1.895) 23(-0.76,1.895) 24(-1.26,1.895)
  rect 2.5x2.5 smd paste-2539.97: 25(0,0)
  silkscreen extent -2.46,-2.15 2.14,2.45, body extent -2.08,-2.07 2.06,2.07, height 0.9
RESC1005X04M-0402 [mm] "Chip Resistor, 2-Leads, Body 1.00x0.50mm, IPC Low Density"
  rect 0.65x0.65 smd: 1(-0.5,0) 2(0.5,0)
  body extent -0.53,-0.27 0.53,0.28, height 0.4
SON50P200X60_HS-9N [mm] "SON, 8-Leads, Body 3.00x2.00mm, Pitch 0.50mm, Thermal Pad 1.50x0.68mm, IPC Medium Density"
  rect 0.85x0.3 smd: 1(-1.45,0.75) 2(-1.45,0.25) 3(-1.45,-0.25) 4(-1.45,-0.75) 5(1.45,-0.75) 6(1.45,-0.25) 7(1.45,0.25) 8(1.45,0.75)
  round 0.5 hole 0.3 mask+0.102: 9(0,0.5) 9(0,-0.5)
  rect 1.4x1.6 smd paste-0.1: 9(0,0)
  silkscreen extent -2.57,-1.17 2.15,1.23, body extent -1.53,-1.02 1.53,1.02, height 0.48
TFBGA-54 [mm]
  round 0.41 smd paste-2539.97 mask+0.102: A1(-3.2,3.2) A2(-2.4,3.2) A7(1.6,3.2) A8(2.4,3.2) A9(3.2,3.2) B1(-3.2,2.4) B2(-2.4,2.4) B3(-1.6,2.4) B7(1.6,2.4) B8(2.4,2.4) B9(3.2,2.4) C1(-3.2,1.6) C2(-2.4,1.6) C3(-1.6,1.6) C7(1.6,1.6) C8(2.4,1.6) C9(3.2,1.6) D1(-3.2,0.8) D2(-2.4,0.8) D3(-1.6,0.8) D7(1.6,0.8) D8(2.4,0.8) D9(3.2,0.8) E1(-3.2,0) E2(-2.4,0) E3(-1.6,0) E7(1.6,0) E8(2.4,0) E9(3.2,0) F1(-3.2,-0.8) F2(-2.4,-0.8) F3(-1.6,-0.8) F7(1.6,-0.8) F8(2.4,-0.8) F9(3.2,-0.8) G1(-3.2,-1.6) G2(-2.4,-1.6) G3(-1.6,-1.6) G7(1.6,-1.6) G8(2.4,-1.6) G9(3.2,-1.6) H1(-3.2,-2.4) H2(-2.4,-2.4) H3(-1.6,-2.4) H7(1.6,-2.4) H8(2.4,-2.4) H9(3.2,-2.4) J1(-3.2,-3.2) J2(-2.4,-3.2) J3(-1.6,-3.2) J7(1.6,-3.2) J8(2.4,-3.2) J9(3.2,-3.2)
  round 0.41 smd mask+0.102: A3(-1.6,3.2)
  silkscreen extent -4.36,-4.15 4.18,4.46, body extent -4.05,-4.05 4.05,4.05, height 1.2
TSQFP50P2200X2200X160-144N [mm] "TSQFP, 144-Leads, Body 20.00x20.00mm, Pitch 0.50mm, IPC Medium Density"
  rect 1.35x0.35 smd: 1(-10.625,8.75) 2(-10.625,8.25) 3(-10.625,7.75) 4(-10.625,7.25) 5(-10.625,6.75) 6(-10.625,6.25) 7(-10.625,5.75) 8(-10.625,5.25) 9(-10.625,4.75) 10(-10.625,4.25) 11(-10.625,3.75) 12(-10.625,3.25) 13(-10.625,2.75) 14(-10.625,2.25) 15(-10.625,1.75) 16(-10.625,1.25) 17(-10.625,0.75) 18(-10.625,0.25) 19(-10.625,-0.25) 20(-10.625,-0.75) 21(-10.625,-1.25) 22(-10.625,-1.75) 23(-10.625,-2.25) 24(-10.625,-2.75) 25(-10.625,-3.25) 26(-10.625,-3.75) 27(-10.625,-4.25) 28(-10.625,-4.75) 29(-10.625,-5.25) 30(-10.625,-5.75) 31(-10.625,-6.25) 32(-10.625,-6.75) 33(-10.625,-7.25) 34(-10.625,-7.75) 35(-10.625,-8.25) 36(-10.625,-8.75) 73(10.625,-8.75) 74(10.625,-8.25) 75(10.625,-7.75) 76(10.625,-7.25) 77(10.625,-6.75) 78(10.625,-6.25) 79(10.625,-5.75) 80(10.625,-5.25) 81(10.625,-4.75) 82(10.625,-4.25) 83(10.625,-3.75) 84(10.625,-3.25) 85(10.625,-2.75) 86(10.625,-2.25) 87(10.625,-1.75) 88(10.625,-1.25) 89(10.625,-0.75) 90(10.625,-0.25) 91(10.625,0.25) 92(10.625,0.75) 93(10.625,1.25) 94(10.625,1.75) 95(10.625,2.25) 96(10.625,2.75) 97(10.625,3.25) 98(10.625,3.75) 99(10.625,4.25) 100(10.625,4.75) 101(10.625,5.25) 102(10.625,5.75) 103(10.625,6.25) 104(10.625,6.75) 105(10.625,7.25) 106(10.625,7.75) 107(10.625,8.25) 108(10.625,8.75)
  rect 0.35x1.35 smd: 37(-8.75,-10.625) 38(-8.25,-10.625) 39(-7.75,-10.625) 40(-7.25,-10.625) 41(-6.75,-10.625) 42(-6.25,-10.625) 43(-5.75,-10.625) 44(-5.25,-10.625) 45(-4.75,-10.625) 46(-4.25,-10.625) 47(-3.75,-10.625) 48(-3.25,-10.625) 49(-2.75,-10.625) 50(-2.25,-10.625) 51(-1.75,-10.625) 52(-1.25,-10.625) 53(-0.75,-10.625) 54(-0.25,-10.625) 55(0.25,-10.625) 56(0.75,-10.625) 57(1.25,-10.625) 58(1.75,-10.625) 59(2.25,-10.625) 60(2.75,-10.625) 61(3.25,-10.625) 62(3.75,-10.625) 63(4.25,-10.625) 64(4.75,-10.625) 65(5.25,-10.625) 66(5.75,-10.625) 67(6.25,-10.625) 68(6.75,-10.625) 69(7.25,-10.625) 70(7.75,-10.625) 71(8.25,-10.625) 72(8.75,-10.625) 109(8.75,10.625) 110(8.25,10.625) 111(7.75,10.625) 112(7.25,10.625) 113(6.75,10.625) 114(6.25,10.625) 115(5.75,10.625) 116(5.25,10.625) 117(4.75,10.625) 118(4.25,10.625) 119(3.75,10.625) 120(3.25,10.625) 121(2.75,10.625) 122(2.25,10.625) 123(1.75,10.625) 124(1.25,10.625) 125(0.75,10.625) 126(0.25,10.625) 127(-0.25,10.625) 128(-0.75,10.625) 129(-1.25,10.625) 130(-1.75,10.625) 131(-2.25,10.625) 132(-2.75,10.625) 133(-3.25,10.625) 134(-3.75,10.625) 135(-4.25,10.625) 136(-4.75,10.625) 137(-5.25,10.625) 138(-5.75,10.625) 139(-6.25,10.625) 140(-6.75,10.625) 141(-7.25,10.625) 142(-7.75,10.625) 143(-8.25,10.625) 144(-8.75,10.625)
  silkscreen extent -10.85,-9.6 9.6,9.6, body extent -10.95,-10.95 10.95,10.95, height 1.6
"VSON-HR (DMQ)" [mm]
  rrect50% 0.6x0.25 smd mask+0.05: 1(-0.65,0.5) 2(-0.65,0) 3(-0.65,-0.5)
  rrect50% 1x0.2 smd paste-2539.97 mask+0.05: 4(0.45,-0.5) 5(0.45,0) 6(0.45,0.5)
  silkscreen extent -1.07,-0.85 1,0.92, body extent -0.75,-0.75 0.75,0.75, height 1.01

## Part data
C1: library part GRM188C71A475KE11D, "4.7 µF ±10% 10V Ceramic Capacitor X7S 0603 (1608 Metric)", ComponentLink1Description=Datasheet, ComponentLink1URL=https://search.murata.co.jp/Ceramy/image/img/A01X/G101/ENG/GRM188R60J476ME15-01.pdf, MPN=GRM188C71A475KE11D
C2 C3 C4: library part GRM155R60J106ME05J, "10 µF ±20% 6.3V Ceramic Capacitor X5R 0402 (1005 Metric)", ComponentLink1Description=Datasheet, ComponentLink1URL=https://search.murata.co.jp/Ceramy/image/img/A01X/G101/ENG/GRM155R60J106ME05-01A.pdf, MPN=GRM155R60J106ME05J
C5 C6 C7 C8 C9 C10 C11 C14 C16 C18 C19 C22 C23 C24 C25 C26 C27 C28 C29 C30 C31 C32 C33 C34 C35 C37 C39 C40 C41 C42 C46 C47 C49 C50 C51 C56: library part GRM155R71H104KE14D, "0.1 µF ±10% 50V Ceramic Capacitor X7R 0402 (1005 Metric)", ComponentLink1Description=Datasheet, ComponentLink1URL=https://search.murata.co.jp/Ceramy/image/img/A01X/G101/ENG/GRM155R60J475ME47-01.pdf, MPN=GRM155R71H104KE14D
C12 C13 C17 C36 C45: library part GRM155R60J475ME47D, "4.7 µF ±20% 6.3V Ceramic Capacitor X5R 0402 (1005 Metric)", ComponentLink1Description=Datasheet, ComponentLink1URL=https://search.murata.co.jp/Ceramy/image/img/A01X/G101/ENG/GRM155R60J475ME47-01.pdf, MPN=GRM155R60J475ME47D
C20 C54: library part GRM1555C1H8R0BA01D, "8 pF ±0.1pF 50V Ceramic Capacitor C0G, NP0 0402 (1005 Metric)", ComponentLink1Description=Datasheet, ComponentLink1URL=https://search.murata.co.jp/Ceramy/image/img/A01X/G101/ENG/GRM155R60J475ME47-01.pdf, MPN=GRM1555C1H8R0BA01D
C21 C55: library part GRM1555C1H220JA01D, "22 pF ±5% 50V Ceramic Capacitor C0G, NP0 0402 (1005 Metric)", ComponentLink1Description=Datasheet, ComponentLink1URL=https://search.murata.co.jp/Ceramy/image/img/A01X/G101/ENG/GRM155R60J475ME47-01.pdf, MPN=GRM1555C1H220JA01D
C38 C44 C48 C53: library part GRM155R70J105KA12J, "1 µF ±10% 6.3V Ceramic Capacitor X7R 0402 (1005 Metric)", ComponentLink1Description=Datasheet, ComponentLink1URL=https://search.murata.co.jp/Ceramy/image/img/A01X/G101/ENG/GRM155R60J475ME47-01.pdf, MPN=GRM155R70J105KA12J
C43: library part GRM155R71H471KA01D, "470 pF ±10% 50V Ceramic Capacitor X7R 0402 (1005 Metric)", ComponentLink1Description=Datasheet, ComponentLink1URL=https://search.murata.co.jp/Ceramy/image/img/A01X/G101/ENG/GRM155R60J475ME47-01.pdf, MPN=GRM155R71H471KA01D
C52: library part GRM188R60J476ME15D, "47 µF ±20% 6.3V Ceramic Capacitor X5R 0603 (1608 Metric)", ComponentLink1Description=Datasheet, ComponentLink1URL=https://search.murata.co.jp/Ceramy/image/img/A01X/G101/ENG/GRM188R60J476ME15-01.pdf, MPN=GRM188R60J476ME15D
D1: library part QBLP595-IW-2897, "White LED Indication - Discrete 3.1V 0402 (1005 Metric)", ComponentLink1Description=Datasheet, ComponentLink1URL=https://www.qt-brightek.com/datasheet/QBLP595-IW-2897.pdf, MPN=QBLP595-IW-2897
J1 J2: "40 Position Connector Plug, Outer Shroud Contacts Surface Mount Gold", ComponentLink1Description=Datasheet, ComponentLink1URL=https://www.hirose.com/en/product/document?clcode=&productname=&series=DF40&documenttype=Catalog&lang=en&documentid=en_DF40_CAT, MPN=DF40C-40DP-0.4V(51)
L1: library part SRP2010DPA-R47M, "470 nH Shielded Inductor 3.6 A 40mOhm Max 0806 (2016 Metric)", ComponentLink1Description=Datasheet, ComponentLink1URL=https://media.digikey.com/pdf/Data%20Sheets/Bourns%20PDFs/SRP2010DPA_Series_DS.pdf, MPN=SRP2010DPA-R47M
L2 L3: library part BLM15AG601SN1D, "600 Ohms @ 100 MHz 1 Ferrite Bead 0402 (1005 Metric) 300mA 520mOhm", ComponentLink1Description=Datasheet, ComponentLink1URL=https://www.murata.com/en-us/products/productdata/8796740059166/ENFA0018.pdf, MPN=BLM15AG601SN1D
R1 R2 R3 R5 R6 R7 R20 R23: library part RC0402FR-07100KL, "100 kOhms ±1% 0.063W, 1/16W Chip Resistor 0402 (1005 Metric) Moisture Resistant Thick Film", ComponentLink1Description=Datasheet, ComponentLink1URL=https://www.yageo.com/upload/media/product/productsearch/datasheet/rchip/PYu-RC_Group_51_RoHS_L_12.pdf, MPN=RC0402FR-07100KL
R4 R15: library part RC0402FR-071K5L, "1.5 kOhms ±1% 0.063W, 1/16W Chip Resistor 0402 (1005 Metric) Moisture Resistant Thick Film", ComponentLink1Description=Datasheet, ComponentLink1URL=https://www.yageo.com/upload/media/product/productsearch/datasheet/rchip/PYu-RC_Group_51_RoHS_L_12.pdf, MPN=RC0402FR-071K5L
R9 R10 R11 R12 R13 R14 R24 R25 R26 R27: library part RC0402FR-0747KL, "47 kOhms ±1% 0.063W, 1/16W Chip Resistor 0402 (1005 Metric) Moisture Resistant Thick Film", ComponentLink1Description=Datasheet, ComponentLink1URL=https://www.yageo.com/upload/media/product/productsearch/datasheet/rchip/PYu-RC_Group_51_RoHS_L_12.pdf, MPN=RC0402FR-0747KL
R16 R17 R18 R19: library part RC0402FR-0710RL, "10 Ohms ±1% 0.063W, 1/16W Chip Resistor 0402 (1005 Metric) Moisture Resistant Thick Film", ComponentLink1Description=Datasheet, ComponentLink1URL=https://www.yageo.com/upload/media/product/productsearch/datasheet/rchip/PYu-RC_Group_51_RoHS_L_12.pdf, MPN=RC0402FR-0710RL
R21: library part RC0402FR-0712K1L, "12.1 kOhms ±1% 0.063W, 1/16W Chip Resistor 0402 (1005 Metric) Moisture Resistant Thick Film", ComponentLink1Description=Datasheet, ComponentLink1URL=https://www.yageo.com/upload/media/product/productsearch/datasheet/rchip/PYu-RC_Group_51_RoHS_L_12.pdf, MPN=RC0402FR-0712K1L
R22: library part RC0402FR-0733RL, "33 Ohms ±1% 0.063W, 1/16W Chip Resistor 0402 (1005 Metric) Moisture Resistant Thick Film", ComponentLink1Description=Datasheet, ComponentLink1URL=https://www.yageo.com/upload/media/product/productsearch/datasheet/rchip/PYu-RC_Group_51_RoHS_L_12.pdf, MPN=RC0402FR-0733RL
R37: library part RC0402FR-0722RL, "22 Ohms ±1% 0.063W, 1/16W Chip Resistor 0402 (1005 Metric) Moisture Resistant Thick Film", ComponentLink1Description=Datasheet, ComponentLink1URL=https://www.yageo.com/upload/media/product/productsearch/datasheet/rchip/PYu-RC_Group_51_RoHS_L_12.pdf, MPN=RC0402FR-0722RL
R38 R39 R40 R41: library part RC0402FR-074K7L, "4.7 kOhms ±1% 0.063W, 1/16W Chip Resistor 0402 (1005 Metric) Moisture Resistant Thick Film", ComponentLink1Description=Datasheet, ComponentLink1URL=https://www.yageo.com/upload/media/product/productsearch/datasheet/rchip/PYu-RC_Group_51_RoHS_L_12.pdf, MPN=RC0402FR-074K7L
SW1: library part "PTS815 SJM 250 SMTR LFS", "Tactile Switch SPST-NO Top Actuated Surface Mount", ComponentLink1Description=Datasheet, ComponentLink1URL=https://www.ckswitches.com/media/2728/pts815.pdf, MPN="PTS815 SJM 250 SMTR LFS"
U1: "ARM® Cortex®-M4 STM32F4 Microcontroller IC 32-Bit Single-Core 180MHz 512KB (512K x 8) FLASH 144-LQFP (20x20)", ComponentLink1Description="New link", ComponentLink1URL=https://www.st.com/content/ccc/resource/technical/document/datasheet/03/b4/b2/36/4c/72/49/29/DM00071990.pdf/files/DM00071990.pdf/jcr:content/translations/en.DM00071990.pdf, MPN=STM32F429ZET6TR
U2: "SDRAM Memory IC 128Mbit Parallel 166 MHz 5 ns 54-TFBGA (8x8)", ComponentLink1Description=Datasheet, ComponentLink1URL=https://www.alliancememory.com/wp-content/uploads/pdf/dram/128M-AS4C8M16SA.pdf, MPN=AS4C8M16SA-6BINTR
U3: "FLASH - NAND (TLC) Memory IC 64Gbit MMC 200 MHz 100-LFBGA (14x18)", ComponentLink1Description=Datasheet, ComponentLink1URL=https://www.issi.com/WW/pdf/21-22TF08G.pdf, MPN=IS21TF08G-JQLI
U5: "Authentication Chip 8-UDFN (2x3)", ComponentLink1Description=Datasheet, ComponentLink1URL=https://ww1.microchip.com/downloads/en/DeviceDoc/ATECC608A-CryptoAuthentication-Device-Summary-Data-Sheet-DS40001977B.pdf, MPN=ATECC608A-MAHDA-S
U6: library part LAN8720A, "2/2 Transceiver Full RMII 24-SQFN (4x4)", ComponentLink1Description=Datasheet, ComponentLink1URL=https://ww1.microchip.com/downloads/aemDocuments/documents/OTH/ProductDocuments/DataSheets/00002165B.pdf, MPN=LAN8720A-CP-ABC
U7: "1/1 Transceiver CANbus 8-DFN (3x3)", ComponentLink1Description=Datasheet, ComponentLink1URL=https://www.analog.com/media/en/technical-documentation/data-sheets/LTC2875.pdf, MPN=LTC2875HDD#TRPBF
U8: "Buck Switching Regulator IC Positive Fixed 3.3V 1 Output 2A 6-VFDFN", ComponentLink1Description=Datasheet, ComponentLink1URL=https://www.ti.com/lit/ds/symlink/tps62825.pdf, MPN=TPS6282533DMQR
X1: library part XRCGB25M000F3M00R0, "25 MHz ±30ppm Crystal 6pF 150 Ohms 4-SMD, No Lead", ComponentLink1Description=Datasheet, ComponentLink1URL=https://www.murata.com/~/media/webrenewal/campaign/ads/america/timing/p79e.ashx?la=en-us, MPN=XRCGB25M000F3M00R0
X2: library part ECS-.327-12.5-16-TR, "32.768 kHz ±20ppm Crystal 12.5pF 90 kOhms 2-SMD, No Lead", ComponentLink1Description=Datasheet, ComponentLink1URL=https://ecsxtal.com/store/pdf/ECX-16.pdf, MPN=ECS-.327-12.5-16-TR

## Via types
v1: diameter 0.4, hole 0.25, Top to Bottom, tented both sides, 262 vias

## Nets (pads, with @x,y where several pads share a name; then routed paths per layer and width w, separated by ;. In a path a pad name is that pad's centre, name@x,y a point inside that pad or via, vN(x,y) a via of type N, cw(c..) or ccw(c..) an arc to the next point about the centre after c; other vN are vias at no path point)
5V_POWER: C1.2 J2.33 J2.34 J2.35 J2.36 J2.37 J2.38 J2.39 J2.40 R1.2 R2.2 U8.6
  other v1: 42.85,41.675 43.35,41.675 43.85,41.675 42.85,42.175 43.35,42.175 43.85,42.175 42.85,42.675 43.35,42.675 43.85,42.675 41.85,43.175 42.35,43.175 42.85,43.175 43.35,43.175 43.85,43.175 41.85,43.675
+3V3: C2.2 C3.2 C4.2 C5.2 C6.2 C7.2 C8.2 C9.2 C10.2 C11.2 C12.2 C13.2 C14.2 C16.2 C17.2 C18.2 C19.2 C22.2 C23.2 C24.2 C25.2 C26.2 C27.2 C28.2 C29.2 C30.2 C31.2 C32.2 C33.2 C34.2 C35.2 C36.2 C41.2 C42.2 C49.2 C51.2 C52.2 C53.2 L1.2 L2.1 L3.1 R3.1 R5.1 R6.1 R9.2 R10.2 R11.2 R12.2 R13.2 R14.2 R20.1 R24.2 R25.2 R26.2 R27.2 R38.2 R39.2 R40.2 R41.2 U1.6 U1.17 U1.30 U1.32 U1.39 U1.52 U1.62 U1.72 U1.84 U1.95 U1.108 U1.121 U1.131 U1.144 U2.A7 U2.A9 U2.B3 U2.C7 U2.D3 U2.E7 U2.J9 U3.E4 U3.F2 U3.F3 U3.F4 U3.F5 U3.F6 U3.F7 U3.F8 U3.F9 U3.H3 U3.H8 U3.L2 U3.L4 U3.L7 U3.L9 U3.P3 U3.P8 U5.8 U6.9 U7.3 U8.3 | length 50.2
  Top w0.186: v1(3.571,13.975) 3.583,13.988 4.587,13.988 U2.J9@4.6,14 ; v1(4.193,7.216) 4.204,7.216 4.589,7.6 U2.A9@4.6,7.6 ; U2.A7@6.2,7.6 v1(6.75,7.6) ; U2.C7@6.2,9.2 v1(6.75,9.2) ; U2.E7@6.2,10.8 6.243,10.843 6.642,10.843 6.692,10.893 v1(6.75,10.893) ; v1(8.85,8.4) U2.B3@9.4,8.4 ; v1(8.85,9.858) 8.908,9.858 9.007,9.957 9.357,9.957 U2.D3@9.4,10 ; R20.1@43.035,8.415 v1(43.66,8.415)
  Top w0.2: v1(39.975,44.9) U8.3@40.525,44.9
  Top w0.3: C23.2@7.35,28.675 7.465,28.79 7.942,28.79 v1(7.962,28.809) ; v1@8.05,28.775 8.15,28.875 8.95,28.875 U1.17@8.975,28.9 ; U1.32@8.975,21.4 7.7,21.4 7.425,21.675 8.125,22.375 8.95,22.375 U1.30@8.975,22.4 ; v1@9.456,42.631 R6.1@9.969,42.631 ; U1.39@11.85,17.525 11.85,16.225 12.05,16.025 C24.2@12.05,16 ; U1.131@17.35,38.775 17.35,39.725 v1(17.494,39.869) 17.494,40.319 C32.2@17.575,40.4 ; C25.2@18.125,15.9 18.181,15.956 18.181,16.481 v1(18.2,16.5) 18.2,16.527 18.325,16.652 18.325,17.5 U1.52@18.35,17.525 ; v1(21.8,48.675) v1(22.8,47.675) ; U1.121@22.35,38.775 22.35,39.725 v1(22.494,39.869) 22.494,40.319 C31.2@22.575,40.4 ; U3.E4@22.375,48.275 v1@22.875,48.775 ; v1(22.825,48.725) 22.844,48.706 22.844,48.631 U3.F4@23.3,48.175 v1(22.8,47.675) ; v1@22.85,48.725 U3.F5@23.3,49.175 U3.F6@23.3,50.175 v1(22.8,50.675) U3.F7@23.3,51.175 v1(22.8,51.675) U3.F8@23.3,52.175 v1(22.8,52.675) U3.F9@23.3,53.175 ; C26.2@23.125,15.9 23.206,15.981 v1(23.206,16.431) 23.35,16.575 U1.62@23.35,17.525 ; U3.F2@23.3,46.175 v1(22.8,46.675) U3.F3@23.3,47.175 v1(22.8,47.675) ; v1(24.8,47.675) U3.H3@25.3,47.175 ; v1(24.8,51.675) U3.H8@25.3,52.175 ; v1(27.8,46.675) U3.L2@28.3,46.175 ; v1(27.8,47.675) U3.L4@28.3,48.175 ; v1(27.8,51.675) U3.L7@28.3,51.175 ; v1(27.8,52.675) U3.L9@28.3,53.175 ; U1.95@30.225,30.4 31.175,30.4 31.338,30.237 31.788,30.237 C29.2@31.85,30.175 ; U1.108@30.225,36.9 31.175,36.9 v1(31.319,37.044) 31.769,37.044 C30.2@31.85,37.125 ; U3.P3@31.3,47.175 v1(31.8,47.675) ; U3.P8@31.3,52.175 v1(31.8,51.675)
  Bottom w0.2: v1(36.9,39.875) 36,39.875 35.6,40.275 35.6,43.65 36.85,44.9 v1(39.975,44.9)
  other v1: 37.15,6.625 37.99,6.635 29.05,16.525 29.65,16.525 30.25,16.525 29.05,17.125 29.65,17.125 30.25,17.125 31.3,24.85 31.319,30.256 35.85,34.375 36.35,34.375 7.925,34.763 7.916,35.352 36.9,39.375 37.4,39.375 37.9,39.375 38.4,39.375 38.9,39.375 37.4,39.875 37.9,39.875 38.4,39.875 38.9,39.875 9.45,42.637
+3V3ETH: C46.2 C47.2 C48.2 L3.2 R15.2 R16.2 R23.1 U6.1 U6.19 | length 2.3
  Top w0.186: v1(36.1,11.15) 36.105,11.145 36.76,11.145 U6.1@36.765,11.14 ; R23.1@43.035,10.415 v1(43.66,10.415)
  Top w0.3: v1@38.985,4.627 R16.2@38.985,5.14 ; v1@41.185,4.627 R15.2@41.185,5.14
  other v1: 38.979,4.621 41.179,4.621 40.375,12.4 40,13.15 40,14.05 40,14.95
ADC1_IN8: J1.11 U1.46
ADC1_IN9: J1.13 U1.47
ADC2_IN0: J1.19 U1.34
ADC2_IN6: J1.21 U1.42
ADC3_IN6: J1.27 U1.20
ADC3_IN7: J1.29 U1.21
ADC3_IN8: J1.31 U1.22
CAN1_RX: U1.103 U7.4 | length 9.2
  Top w0.186: U1.103@30.225,34.4 31.2,34.4 33.125,34.4 34.275,33.25 37.325,33.25 37.75,33.675 U7.4@37.75,34.725
CAN1_TX: U1.104 U7.1 | length 11.1
  Top w0.186: U1.104@30.225,34.9 32.075,34.9 33.45,34.9 33.875,35.325 33.875,37.4 34.275,37.8 37.05,37.8 37.75,37.1 U7.1@37.75,36.225
CAN_H: J2.14 U7.7
CAN_L: J2.16 U7.6
CAN_RS: U1.102 U7.8 | length 15.5
  Top w0.186: U1.102@30.225,33.9 v1(32.075,33.9) ; U7.8@40.55,36.225 40.575,36.25 v1(40.575,36.75)
  Bottom w0.186: v1(32.075,33.9) 33.275,33.9 33.875,34.5 33.875,37.65 34.3,38.075 40.1,38.075 40.575,37.6 v1(40.575,36.75)
CAN_SPLIT: J2.18 U7.5
DAC_EXTI9: J1.14 J2.17 U1.101 | length 1
  Top w0.186: U1.101@30.225,33.4 v1(31.2,33.4)
DAC_OUT1: J1.10 J2.13 U1.40
DAC_OUT2: J1.12 J2.15 U1.41
eMMC_CLK: R37.1 U1.113 | length 27.1
  Top w0.186: U1.113@26.35,38.775 v1(26.35,39.75)
  Signal 1 w0.177: v1(26.35,39.75) 26.35,38.5 26.55,38.3 33.9,38.3 34.925,39.325 34.925,50.375 34.575,50.725 33.05,50.725 32.575,50.25 v1(32.575,48.9)
  Bottom w0.186: v1(32.575,48.9) R37.1@32.575,49.6
eMMC_CMD: R10.1 U1.116 U3.P5 | length 26.7
  Top w0.186: U1.116@24.85,38.775 v1(24.85,39.75) ; v1(30.8,48.675) U3.P5@31.3,49.175
  Signal 1 w0.177: v1(24.85,39.75) 24.809,39.709 24.809,37.109 23.975,36.275 22.625,36.275 21.95,36.95 21.95,42.375 22.2,42.625 23.225,42.625 26,45.4 26,47.225 26.975,48.2 30.325,48.2 v1(30.8,48.675)
  Bottom w0.186: v1(30.8,48.675) 30.8,48.733 30.925,48.858 R10.1@30.925,49.525
eMMC_DAT0: R27.1 U1.98 U3.K2 | length 26.7
  Top w0.186: v1(26.8,45.675) U3.K2@27.3,46.175 ; v1(29.25,31.9) U1.98@30.225,31.9
  Signal 1 w0.177: v1(26.8,45.675) 26.788,45.662 26.788,44.738 27.525,44 29.2,44 29.55,43.65 29.55,40.625 29.1,40.175 28.225,40.175 27.675,40.725 26.225,40.725 25.6,40.1 25.6,39.1 25.275,38.775 25.275,36.775 24.85,36.35 24.85,33.025 25.975,31.9 v1(29.25,31.9)
  Bottom w0.186: R27.1@26.775,44.725 26.8,44.75 v1(26.8,45.675)
eMMC_DAT1: R26.1 U1.99 U3.N2 | length 26
  Top w0.186: v1(28.7,32.425) 28.713,32.412 30.212,32.412 U1.99@30.225,32.4 ; v1(29.8,45.675) U3.N2@30.3,46.175
  Signal 2 w0.177: v1(28.7,32.425) 28.7,40.801 28.7,40.926 28.529,41.098 28.287,41.098 28.144,40.955 27.902,40.955 27.66,41.197 27.66,41.44 28.863,42.643 28.863,42.885 28.621,43.127 28.379,43.127 27.175,41.924 26.933,41.924 26.691,42.166 26.691,42.408 28.186,43.903 28.186,44.145 27.944,44.387 27.701,44.387 27.413,44.099 27.171,44.099 27,44.271 27,44.836 27,44.975 27.7,45.675 v1(29.8,45.675)
  Bottom w0.186: R26.1@28.775,45.825 29.325,45.825 29.434,45.716 29.759,45.716 v1(29.8,45.675)
eMMC_DAT2: R25.1 U1.111 U3.K3 | length 26.7
  Top w0.186: v1(26.8,46.675) U3.K3@27.3,47.175 ; v1(27.337,39.75) 27.343,39.743 27.343,38.782 U1.111@27.35,38.775
  Signal 1 w0.177: v1(26.8,46.675) 27.35,46.125 27.35,45.075 27.575,44.85 30.575,44.85 30.9,45.175 30.9,46.5 31.475,47.075 33.6,47.075 34,46.675 34,40.2 33.05,39.25 27.836,39.25 v1(27.337,39.75)
  Bottom w0.186: R25.1@26,46.65 26.025,46.675 v1(26.8,46.675)
eMMC_DAT3: R24.1 U1.112 U3.N3 | length 26.7
  Top w0.186: v1(26.825,40.2) 26.838,40.188 26.838,38.787 U1.112@26.85,38.775 ; v1(29.8,46.675) U3.N3@30.3,47.175
  Signal 1 w0.177: v1(26.825,40.2) 26.838,40.188 26.838,39.288 27.347,38.778 33.653,38.778 34.45,39.575 34.45,47.875 34.15,48.175 31.3,48.175 30.85,47.725 29.775,47.725 29.5,47.45 29.5,46.983 29.8,46.683 v1(29.8,46.675)
  Bottom w0.186: v1(29.8,46.675) 30.425,46.675 R24.1@30.6,46.5
eMMC_DAT4: R14.1 U1.139 U3.N8 | length 26.7
  Top w0.186: U1.139@13.35,38.775 v1(13.35,39.75) ; U3.N8@30.3,52.175 v1(30.8,51.675)
  Signal 1 w0.177: v1(13.35,39.75) 17.475,43.875 22.875,43.875 25.45,46.45 25.45,47.575 27.225,49.35 30.225,49.35 30.8,49.925 v1(30.8,51.675)
  Bottom w0.186: R14.1@29.9,51.7 29.925,51.675 v1(30.8,51.675)
eMMC_DAT5: R13.1 U1.140 U3.K8 | length 26.7
  Top w0.186: U1.140@12.85,38.775 12.863,38.788 12.863,40.287 v1(12.875,40.3) ; v1(26.8,51.675) U3.K8@27.3,52.175
  Signal 1 w0.177: v1(12.875,40.3) 12.89,40.315 12.89,41.29 21.55,49.95 28.525,49.95 28.875,50.3 28.875,50.725 28.5,51.1 27.375,51.1 v1(26.8,51.675)
  Bottom w0.186: R13.1@26.8,50.85 v1(26.8,51.675)
eMMC_DAT6: R12.1 U1.96 U3.N9 | length 26
  Top w0.186: v1(29.25,30.9) U1.96@30.225,30.9 ; U3.N9@30.3,53.175 v1(30.8,52.675)
  Signal 2 w0.177: v1(29.25,30.9) 29.9,31.55 29.9,43.625 30.8,44.525 30.8,47.725 31.275,48.2 31.275,49.95 30.335,50.89 30.335,52.209 v1(30.8,52.675)
  Bottom w0.186: v1(30.8,52.675) 30.8,53.775 R12.1@30.825,53.8
eMMC_DAT7: R11.1 U1.97 U3.K9 | length 26
  Top w0.186: v1(26.8,52.675) U3.K9@27.3,53.175 ; v1(28.7,31.425) 28.713,31.413 30.212,31.413 U1.97@30.225,31.4
  Signal 2 w0.177: v1(26.8,52.675) 26.798,52.673 26.498,52.673 26.3,52.475 26.3,41.7 27.8,40.2 27.8,31.775 28.11,31.465 28.66,31.465 v1(28.7,31.425)
  Bottom w0.186: v1(26.8,52.675) R11.1@26.8,53.475
eMMC_DS: U3.K5
eMMC_RSTN: R9.1 U1.100 U3.M5 | length 26
  Top w0.186: v1(29.25,32.9) U1.100@30.225,32.9 ; U3.M5@29.3,49.175 v1(29.8,48.675)
  Signal 2 w0.177: v1(29.25,32.9) 29.25,44.025 30.275,45.05 30.275,47.1 29.175,48.2 27.7,48.2 27.075,48.825 27.075,49.7 27.525,50.15 29.275,50.15 29.8,49.625 v1(29.8,48.675)
  Bottom w0.186: v1(29.8,48.675) R9.1@29.8,49.525
EN: R1.1 U8.1 | length 1.3
  Top w0.186: U8.1@41.525,44.9 42.625,44.9 R1.1@42.75,44.775
ETH_CRS_DV: R19.1 U1.43 | length 48.5
  Top w0.186: U1.43@13.85,17.525 13.85,18.629 14.001,18.78 14.03,18.78 14.298,19.048 14.298,19.426 14.107,19.617 v1(14.107,19.675) ; v1(40.085,4.515) R19.1@40.085,5.14
  Bottom w0.186: v1(14.107,19.675) 13.525,20.257 13.525,20.625 13.8,20.9 14.775,20.9 15.475,20.2 15.475,18.325 19.687,14.112 19.753,14.047 20.088,14.047 20.558,14.516 20.893,14.516 21.228,14.181 21.228,13.846 20.501,13.118 20.501,12.783 20.836,12.448 21.171,12.448 21.898,13.175 22.234,13.175 22.569,12.84 22.569,12.505 21.842,11.778 21.842,11.443 22.177,11.107 22.512,11.107 23.239,11.835 23.574,11.835 23.909,11.499 23.909,11.164 23.182,10.437 23.182,10.102 23.517,9.767 23.853,9.767 24.501,10.416 24.837,10.416 25.172,10.08 25.172,9.745 24.613,9.187 24.613,8.852 24.948,8.516 25.284,8.516 25.451,8.684 25.786,8.684 26.121,8.349 26.121,8.014 26.121,7.679 26.475,7.325 27.65,6.15 38.45,6.15 v1(40.085,4.515)
ETH_MDC: U1.27 U6.13 | length 48.5
  Top w0.186: U1.27@8.975,23.9 10.292,23.9 10.392,24 v1(10.45,24) ; v1(40.555,8.015) U6.13@40.555,8.64
  Bottom w0.186: v1(10.45,24) 11.425,24 11.518,24 11.692,24.173 11.692,24.498 11.865,24.671 12.212,24.671 12.386,24.498 12.386,23.578 12.559,23.405 12.906,23.405 13.08,23.578 13.08,24.498 13.253,24.671 13.6,24.671 13.774,24.498 13.774,23.578 13.947,23.405 14.294,23.405 14.468,23.578 14.468,24.498 14.641,24.671 14.988,24.671 15.162,24.498 15.162,23.578 15.335,23.405 15.682,23.405 15.856,23.578 15.856,24.318 16.029,24.492 16.376,24.492 16.55,24.318 16.55,24.173 16.723,24 19.625,24 20.925,24 27.5,17.425 27.5,16.075 28.15,15.425 30.375,15.425 31.925,13.875 34.025,13.875 34.85,13.05 34.85,9.775 35.485,9.14 39.43,9.14 v1(40.555,8.015)
ETH_MDIO: R15.1 U1.36 U6.12 | length 48.5
  Top w0.186: v1(8.65,17.975) 8.975,18.3 U1.36@8.975,19.4 ; U6.12@39.9,7.995 39.9,7.4 40.085,7.215 v1(40.41,7.215) 40.735,7.215 41.185,6.765 R15.1@41.185,6.14
  Bottom w0.186: v1(8.65,17.975) 8.65,16.938 9.138,16.45 11.675,16.45 12.325,17.1 12.325,18.55 12.125,18.75 12.125,21.45 12.6,21.925 18.4,21.925 22.75,17.575 23.125,17.575 32.3,8.4 39.225,8.4 v1(40.41,7.215)
ETH_REF_CLK: R22.1 U1.35 | length 48.6
  Top w0.186: v1(7.975,17.5) 7.975,19.507 8.286,19.818 8.893,19.818 U1.35@8.975,19.9 ; v1(33.225,13.125) 33.225,10.784 33.803,10.206 33.803,10.197 R22.1@34.035,9.965
  Bottom w0.186: v1(7.975,17.5) 7.975,18.675 8.425,19.125 9.025,19.125 9.561,18.589 9.561,17.56 9.896,17.225 11.175,17.225 11.525,17.575 11.525,22.175 11.85,22.5 20.425,22.5 20.75,22.175 20.816,22.109 21.061,22.109 21.163,22.211 21.408,22.211 21.654,21.966 21.654,21.72 21.053,21.12 21.053,20.875 21.299,20.629 21.544,20.629 22.144,21.23 22.39,21.23 22.635,20.984 22.635,20.739 22.035,20.138 22.035,19.893 22.28,19.648 22.525,19.648 23.112,20.234 23.358,20.234 23.603,19.989 23.603,19.744 23.515,19.656 23.515,19.41 25.525,17.4 25.525,16.35 28.75,13.125 v1(33.225,13.125)
ETH_RXD0: R17.1 U1.44 | length 48.5
  Top w0.186: U1.44@14.35,17.525 14.35,18.462 14.775,18.887 14.775,19.539 14.775,19.984 14.575,20.184 v1(14.575,20.2) ; v1(36.085,4.515) R17.1@36.085,5.14
  Bottom w0.186: v1(14.575,20.2) 14.575,16.8 16.763,14.612 17.45,13.925 17.45,13.589 17.45,13.254 17.786,12.919 18.121,12.919 18.392,13.19 18.727,13.19 19.062,12.855 19.062,12.52 18.242,11.7 18.242,11.365 18.577,11.03 18.912,11.03 19.822,11.939 20.157,11.939 20.492,11.604 20.492,11.268 19.583,10.359 19.583,10.024 19.918,9.689 20.253,9.689 21.162,10.598 21.498,10.598 21.833,10.263 21.833,9.928 20.923,9.019 20.923,8.683 21.259,8.348 21.594,8.348 22.503,9.257 22.838,9.257 23.173,8.922 23.173,8.587 22.264,7.678 22.264,7.343 22.599,7.007 22.934,7.007 23.844,7.917 24.179,7.917 24.514,7.582 24.514,7.246 23.605,6.337 23.605,6.002 23.94,5.667 24.275,5.667 24.824,6.216 25.159,6.216 25.225,6.15 25.875,5.5 35.1,5.5 v1(36.085,4.515)
ETH_RXD1: R18.1 U1.45 | length 48.5
  Top w0.186: U1.45@14.85,17.525 14.85,15.575 v1(15.25,15.175) ; v1(34.985,4.515) R18.1@34.985,5.14
  Bottom w0.186: v1(15.25,15.175) 15.25,11.933 15.25,11.191 15.538,10.903 15.538,10.568 14.648,9.678 14.648,9.343 14.983,9.007 15.318,9.007 17.003,10.692 17.338,10.692 17.673,10.357 17.673,10.021 15.928,8.276 15.928,7.941 16.263,7.606 16.598,7.606 18.343,9.351 18.678,9.351 19.014,9.016 19.014,8.681 17.269,6.936 17.269,6.6 17.604,6.265 17.939,6.265 19.684,8.01 20.019,8.01 20.354,7.675 20.354,7.34 18.609,5.595 18.609,5.26 18.944,4.925 19.28,4.925 20.23,5.875 20.565,5.875 20.631,5.81 21.926,4.515 v1(34.985,4.515)
ETH_TX_EN: U1.126 U6.16 | length 48.5
  Top w0.186: U1.126@19.85,38.775 19.85,32.125 28.55,23.425 v1(28.55,19.125) ; U6.16@40.555,10.14 41.34,10.14 41.528,10.328 41.528,11.244 41.802,11.518 42.643,11.518 43,11.875 43,13.1 v1(43.025,13.125)
  Bottom w0.186: v1(28.55,19.125) 30.725,19.125 31.425,18.425 32.525,18.425 32.618,18.425 32.76,18.567 32.76,18.819 32.902,18.961 33.566,18.961 33.708,18.819 33.708,18.567 33.85,18.425 34.521,18.425 42.175,18.425 43.025,17.575 v1(43.025,13.125)
ETH_TXD0: U1.73 U6.17 | length 48.5
  Top w0.186: v1(30.225,18.55) U1.73@30.225,19.4 ; U6.17@40.555,10.64 40.577,10.662 41.041,10.662 41.15,10.77 41.15,11.475 41.5,11.825 42.291,11.825 42.4,11.934 v1(42.4,12.35)
  Bottom w0.186: v1(30.225,18.55) 30.254,18.521 30.254,18.071 30.975,17.35 30.975,16.7 31.3,16.375 31.525,16.375 31.618,16.375 31.792,16.548 31.792,17.45 31.965,17.624 32.312,17.624 32.486,17.45 32.486,14.772 32.659,14.598 33.006,14.598 33.18,14.772 33.18,17.45 33.353,17.624 33.7,17.624 33.874,17.45 33.874,14.772 34.047,14.598 34.394,14.598 34.568,14.772 34.568,17.45 34.741,17.624 35.088,17.624 35.262,17.45 35.262,14.772 35.435,14.598 35.782,14.598 35.956,14.772 35.956,17.45 36.129,17.624 36.476,17.624 36.65,17.45 36.65,14.772 36.823,14.598 37.17,14.598 37.344,14.772 37.344,17.45 37.517,17.624 37.864,17.624 38.038,17.45 38.038,14.849 38.211,14.676 38.558,14.676 38.732,14.849 38.732,16.201 38.905,16.375 39.8,16.375 40.45,16.375 42.4,14.425 v1(42.4,12.35)